# Altium PCB Final.PcbDoc
Units mm, origin at the board's own origin, x right, y up, seen from the top; angles counter-clockwise.
Board outline 60 x 70 mm, 4 copper layers (Top Layer, gnd, pwr, Bottom Layer), stack 0.603 mm thick; 91 components, 65 nets, 402 pads, 105 vias.
Unrouted connection lines stored in the file: 84.
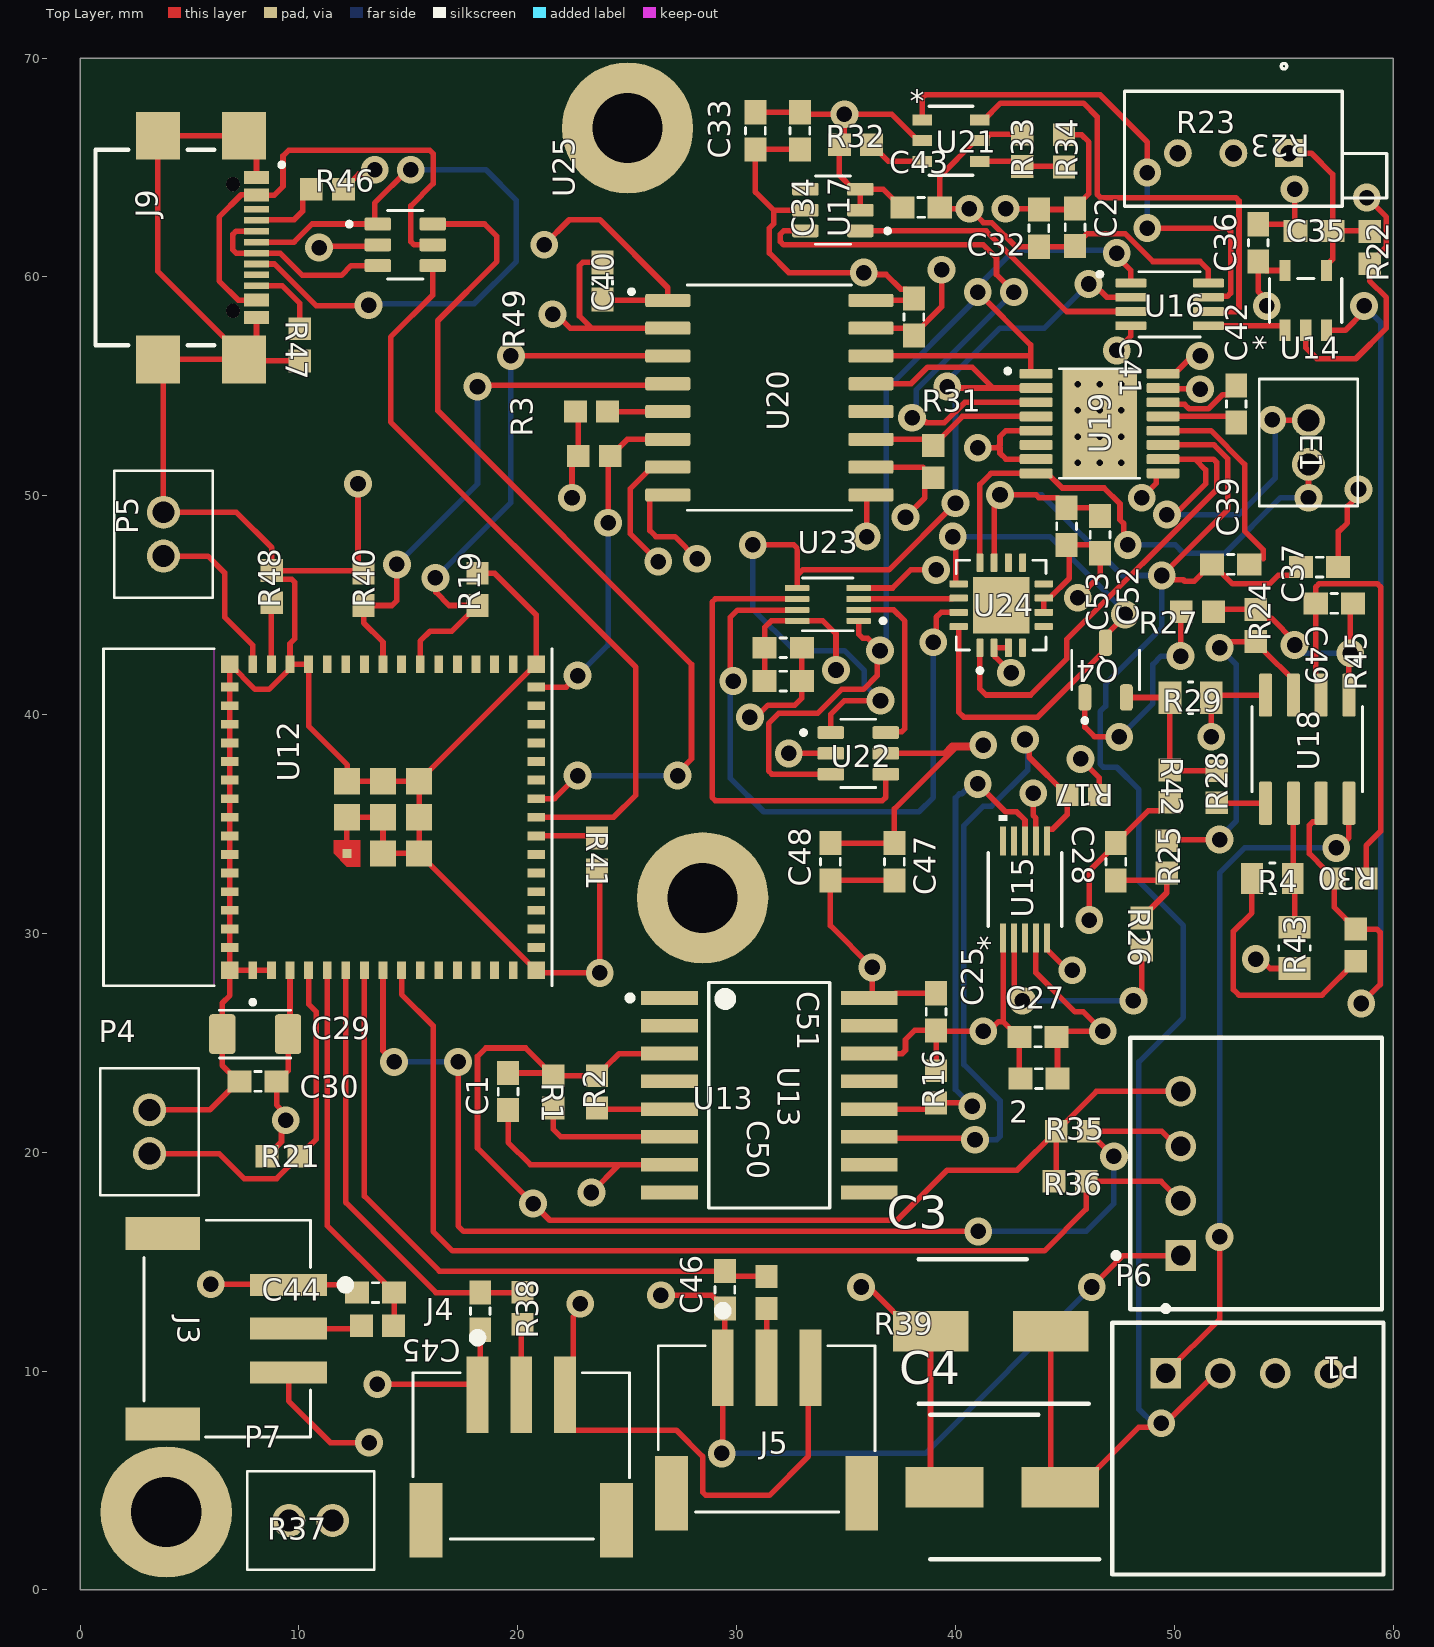
[diagram p0: Top Layer view]
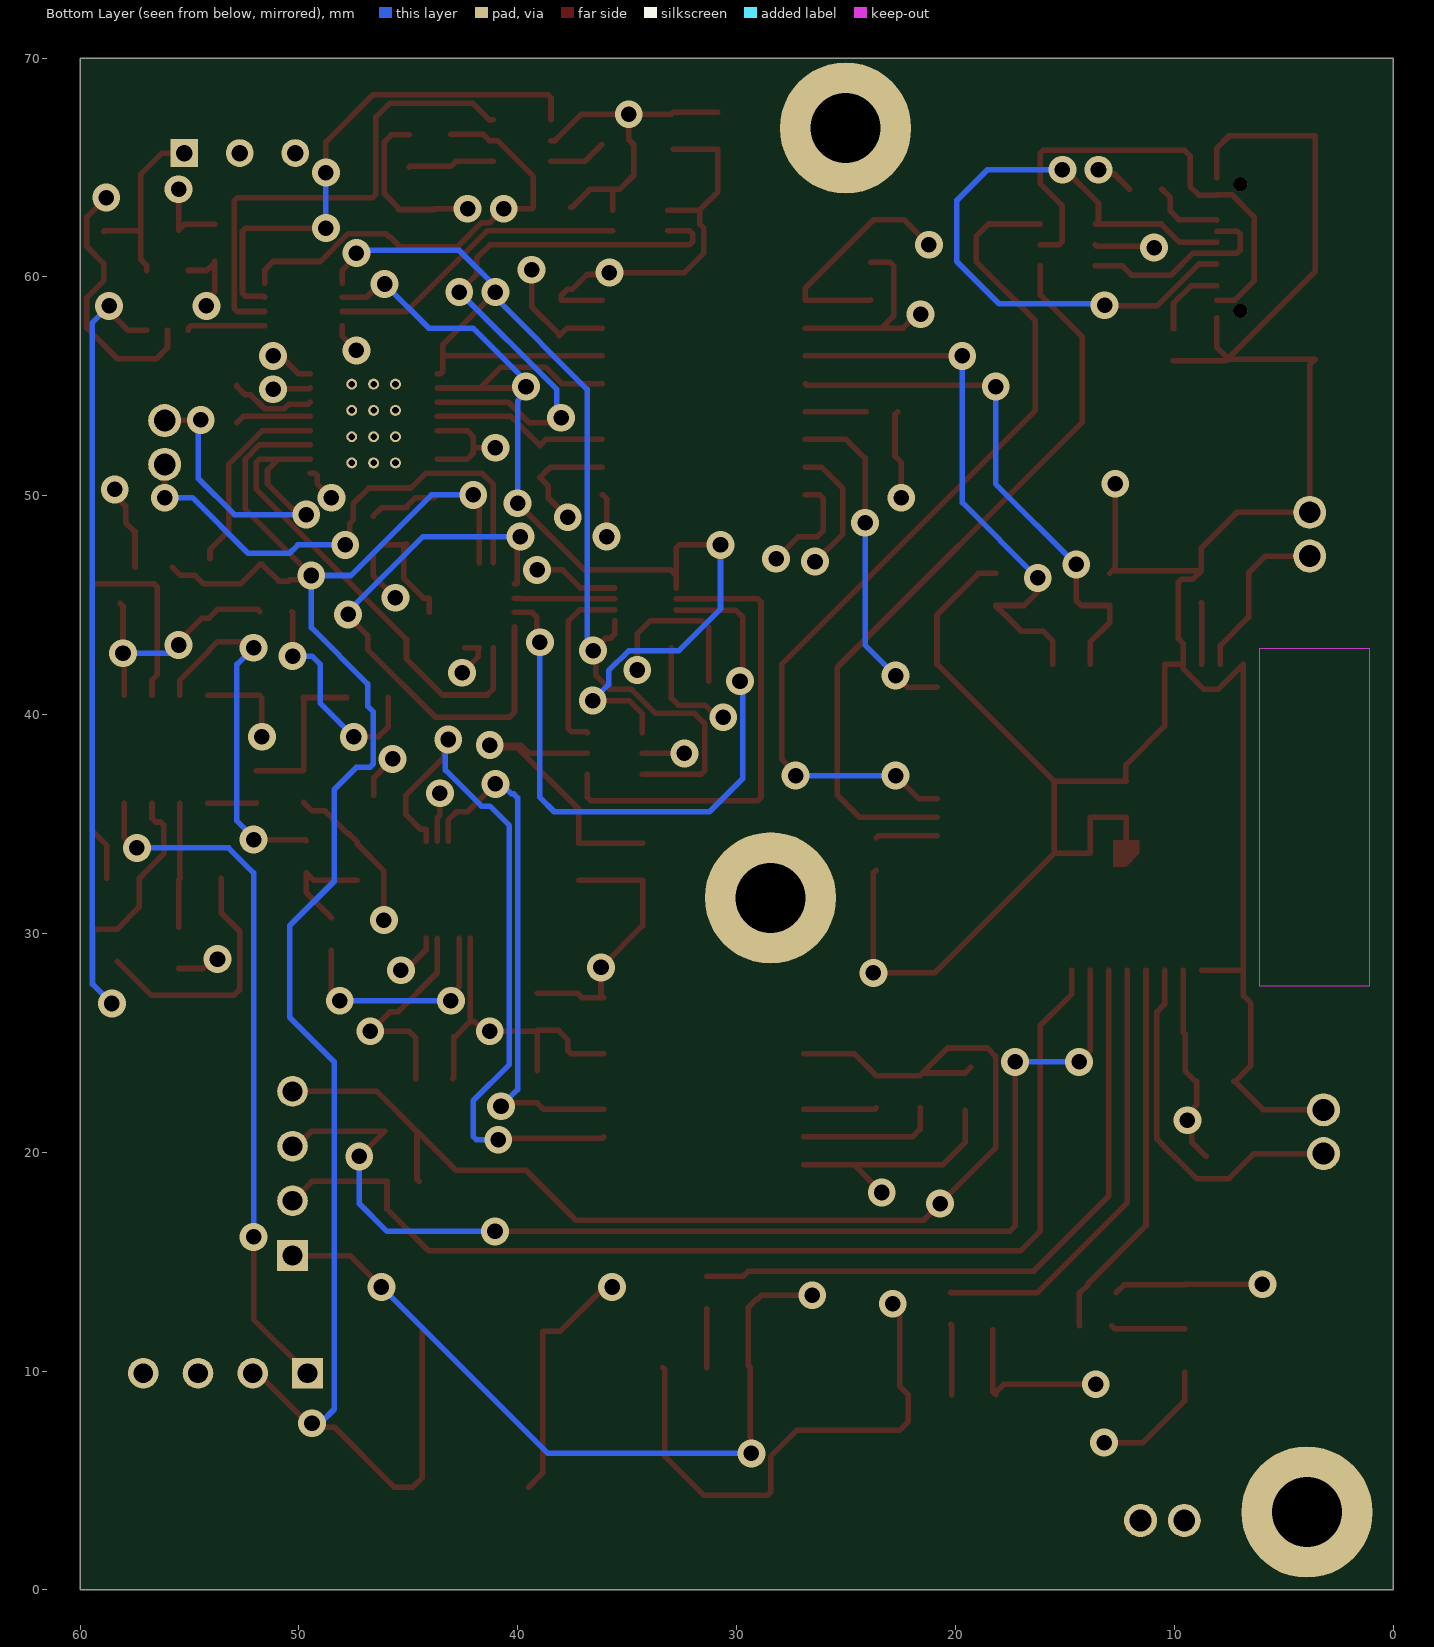
[diagram p1: Bottom Layer view, seen from below]
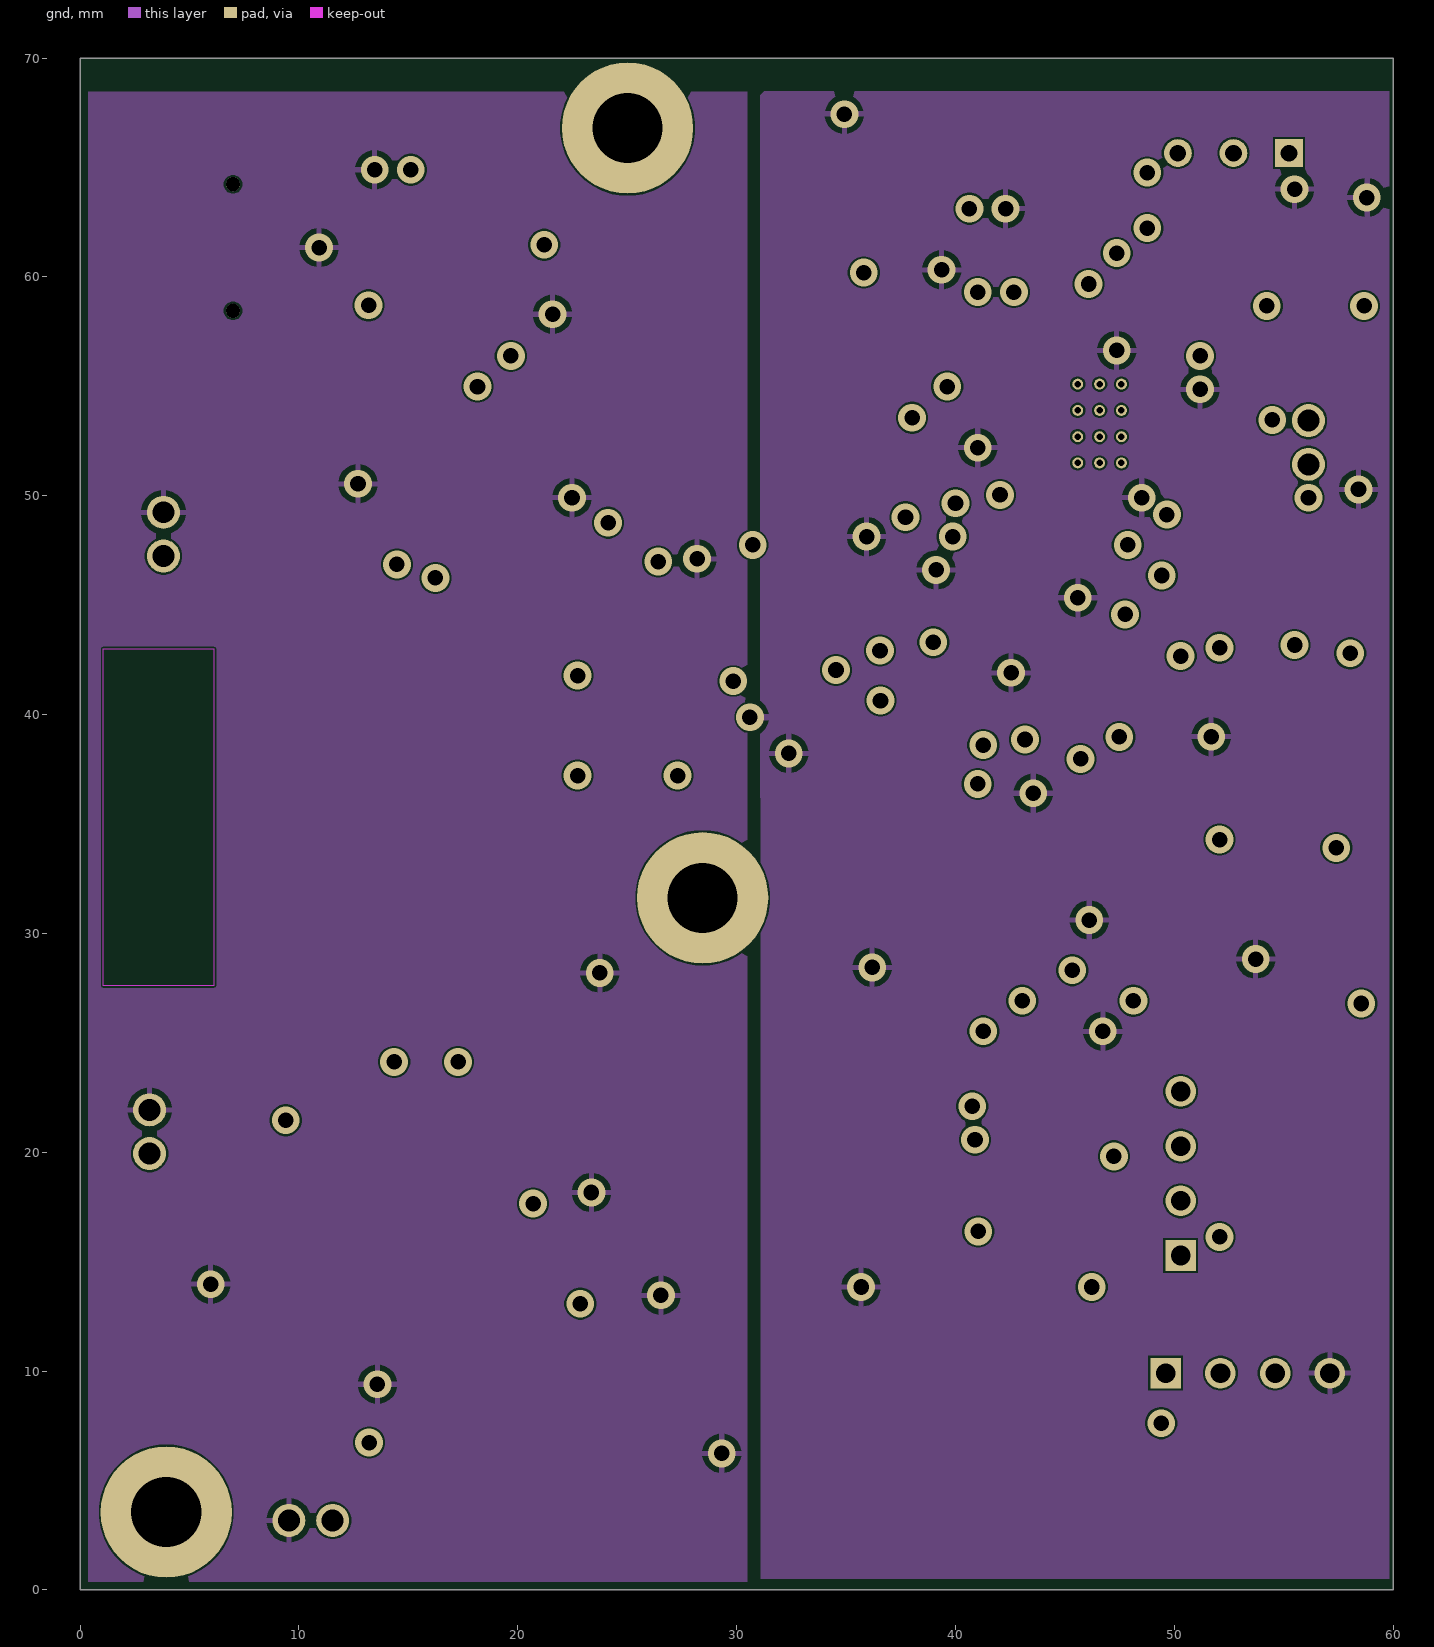
[diagram p2: gnd]
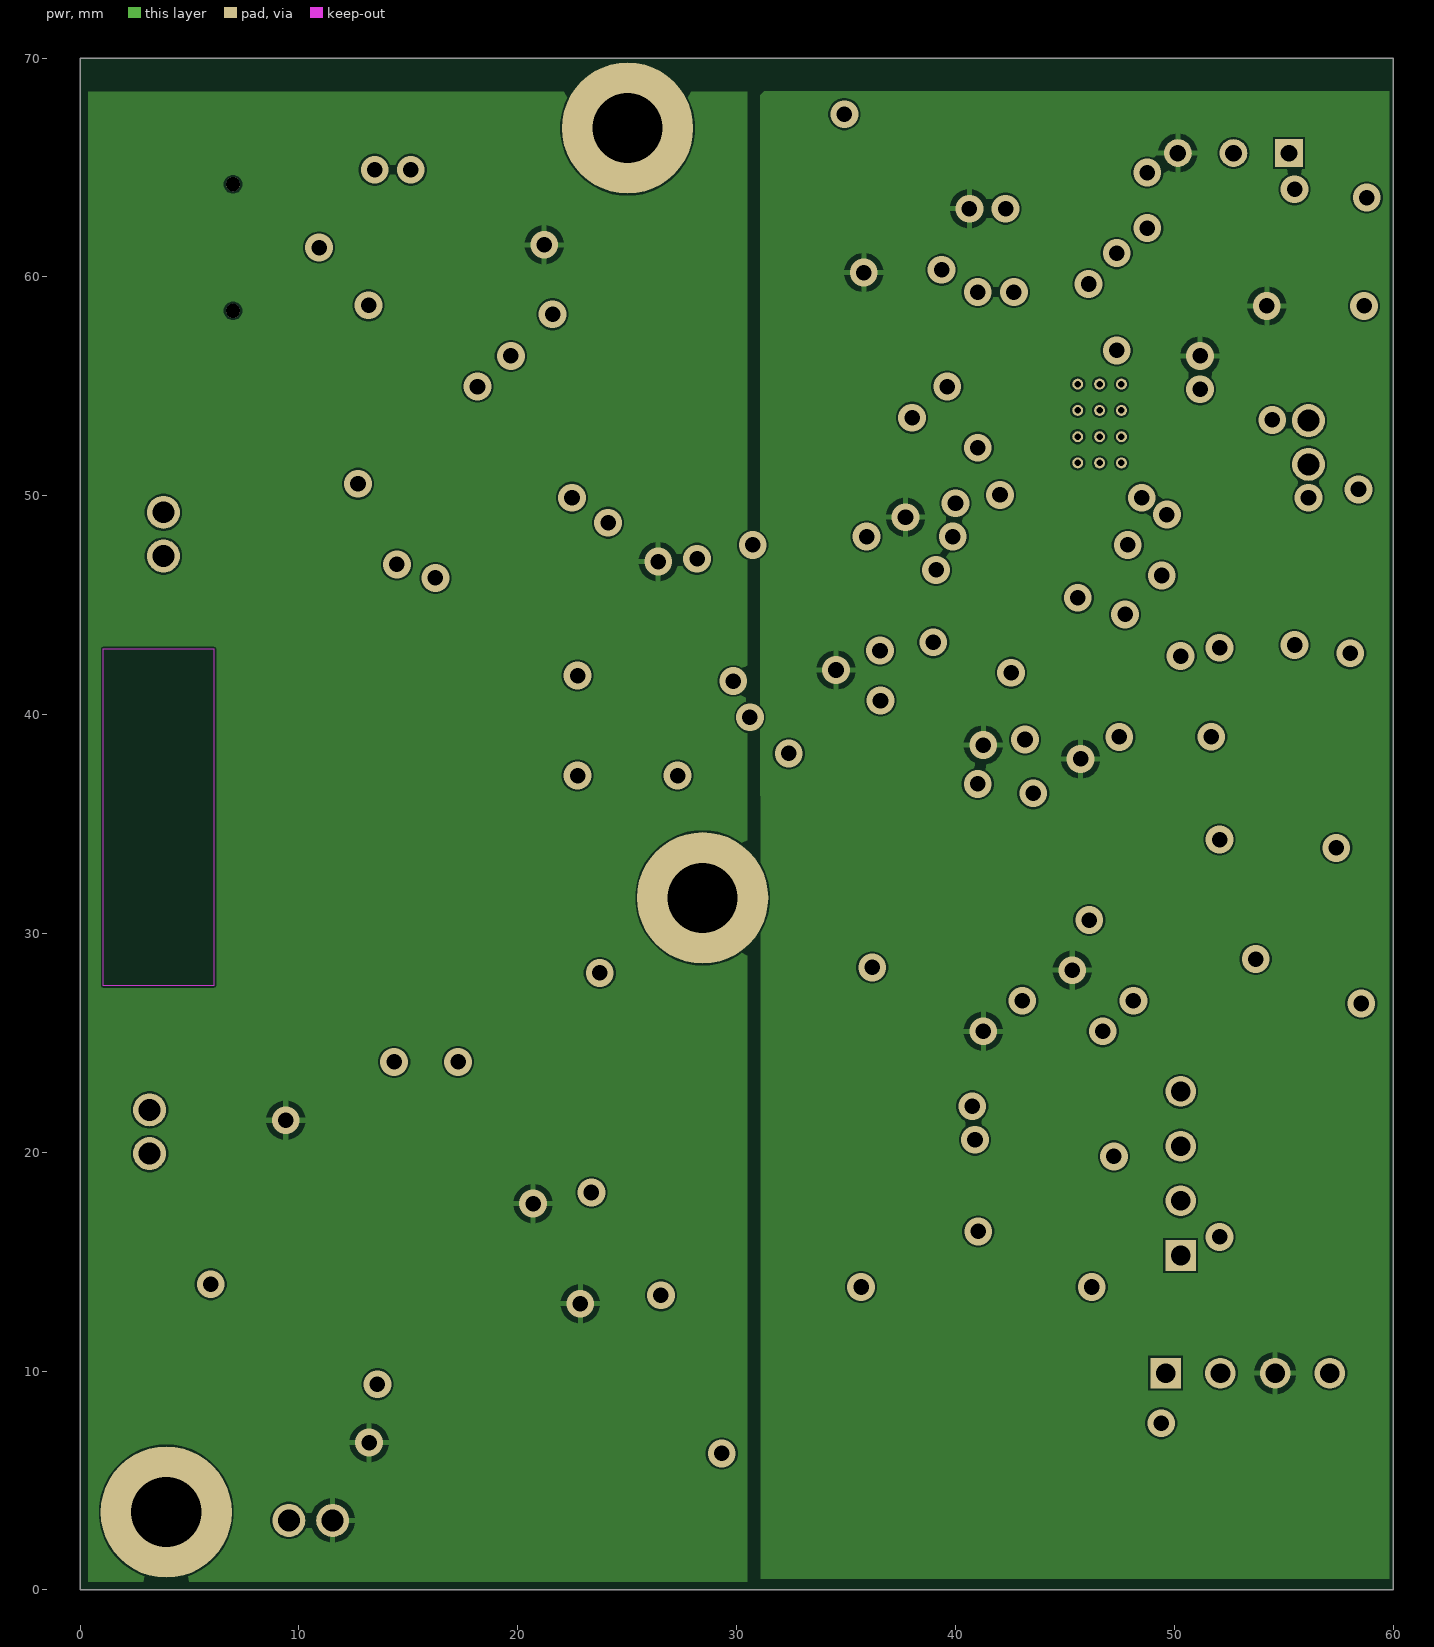
[diagram p3: pwr]
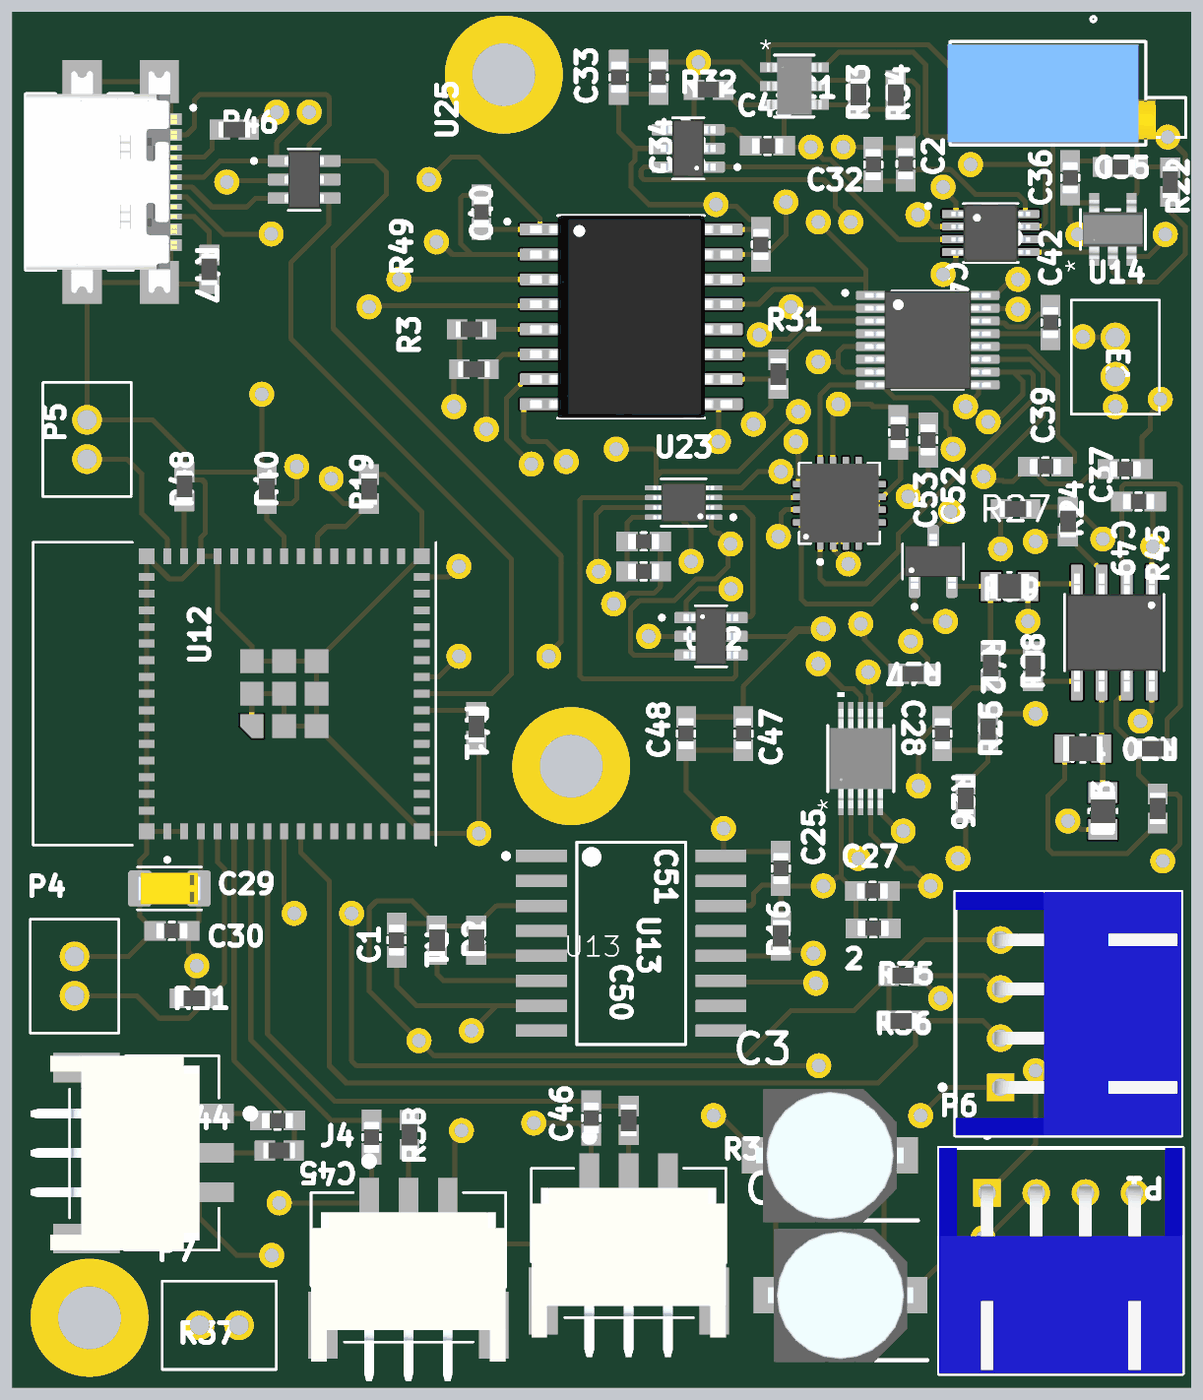
[diagram p4: 3D render of the assembled board from above, using the file's embedded part models]

## Layer stack, top to bottom
Top Solder: solder mask 0.0102, Solder Resist, Dk 3.5
Top Layer: signal copper 0.0356
Dielectric 2: prepreg 0.0711, PP-006, Dk 4.1
gnd: signal copper 0.035
Dielectric 1: dielectric 0.32, FR-4, Dk 4.8
pwr: signal copper 0.035
Dielectric 3: prepreg 0.0711, PP-006, Dk 4.1
Bottom Layer: signal copper 0.0356
Bottom Solder: solder mask 0.0102, Solder Resist, Dk 3.5

## Board outline
0,0 60,0 60,70 0,70

## Design rules (kind name [scope] priority, off if disabled: settings)
Clearance [All] p1: gap=0.09 ignorepadtopadclearanceinfootprint=FALSE
HoleSize [All] p1: absolutevalues=TRUE maxlimit=10 minlimit=0.025 maxpercent=80.000 minpercent=20.000
MinimumSolderMaskSliver [All] p1: minsoldermaskwidth=0.1
PolygonConnect [All] p1: connectstyle=Relief reliefconductorwidth=0.254 reliefentries=4 polygonreliefangle="90 Angle" airgapwidth=0.254
RoutingVias [All] p1: holewidth=0.711 width=1.27 viastyle="Through Hole" minholewidth=0.711 minwidth=1.27 maxholewidth=0.711 maxwidth=1.27
SilkToSilkClearance [All] p1: silktosilkclearance=0.15
SilkToSolderMaskClearance [IsPad] p1: minsilkscreentomaskgap=0.15 clearancetoexposedcopper=TRUE
SolderMaskExpansion [All] p1: expansion=0 istentingtop=FALSE
SupplyNets "Schematic Supply Nets_5" [InNet('ISOLATED_MP1584')] p1: voltage=0.000
SupplyNets "Schematic Supply Nets_4" [InNet('ISO_GND')] p2: voltage=0.000
SupplyNets "Schematic Supply Nets_3" [InNet('ISO_3.3v')] p3: voltage=0.000
SupplyNets "Schematic Supply Nets_2" [InNet('ISO_24v')] p4: voltage=0.000
SupplyNets "Schematic Supply Nets_1" [InNet('GND')] p5: voltage=0.000
SupplyNets "Schematic Supply Nets" [InNet('3.3v')] p6: voltage=0.000
Width [All] p1: maxlimit=0.254 minlimit=0.254 preferedwidth=0.254
26 further rules are at their usual default settings.

## Classes and differential pairs
component class MCU_and_Digital: C1 C25 C29 C30 C44 C45 C46 J3 J4 J5 J9 P1 P4 P5 P6 P7 R1 R2 R16 R17 R19 R21 R35 R36 R37 R38 R39 R40 R41 R46 R47 R48 R49 U12 U13 U25
component class Isolated_Output: 2 C2 C3 C27 C28 C32 C33 C34 C35 C36 C37 C39 C40 C41 C42 C43 R3 R22 R23 R26 R31 R32 R33 R34 U14 U15 U16 U17 U19 U20 U21
component class Current_Sink: C4 C47 C48 C49 C50 C51 C52 C53 E1 Q4 R4 R24 R25 R27 R28 R29 R30 R42 R43 R45 U18 U22 U23 U24

## Components (designator, comment, footprint, x,y, rotation, side; value= is the part's Value field where it differs from the comment)
2 "100n" CAPC1608X90 43.815,23.368 r0 top
C1 "100nf" CAPC1608X90 19.558,22.772 r90 top
C2 "1uf" CAPC1608X90 45.466,62.269 r90 top
C3 "47uf" CAPAE660X800N 41.612,11.811 r180 top
C4 "22uf" CAPAE660X610N 42.147,4.699 r180 top
C25 "100nf" CAPC1608X90 39.116,26.416 r270 top
C27 "1u" CAPC1608X90 43.776,25.273 r0 top
C28 "100nF" CAPC1608X90 47.329,33.274 r90 top
C29 "10uf" RESC3216X125N 8.001,25.4 r180 top
C30 "100nf" CAPC1608X90 8.128,23.241 r0 top
C32 "100nf" CAPC1608X90 43.815,62.23 r90 top
C33 "100nf" CAPC1608X90 30.861,66.675 r90 top
C34 "1uf" CAPC1608X90 32.893,66.675 r90 top
C35 "100nf" CAPC1608X90 56.388,62.103 r0 top
C36 "100nf" CAPC1608X90 53.839,61.558 r270 top
C37 "100nf" CAPC1608X90 56.642,46.736 r180 top
C39 "100nf" CAPC1608X90 52.578,46.863 r180 top
C40 "100nf" CAPC1608X90 23.876,59.817 r270 top
C41 "100nf" CAPC1608X90 38.1,58.166 r270 top
C42 "22nf" CAPC1608X90 52.832,54.19 r90 top
C43 "100nf" CAPC1608X90 38.433,63.18 r180 top
C44 "100nf" CAPC1608X90 13.501,13.589 r0 top
C45 "100nf" CAPC1608X90 18.288,12.739 r90 top
C46 "100nf" CAPC1608X90 29.464,13.716 r90 top
C47 "100nf" CAPC1608X90 37.211,33.274 r270 top
C48 "1uf" CAPC1608X90 34.29,33.274 r270 top
C49 "10nf" CAPC1608X90 57.316,45.085 r0 top
C50 "100nf" CAPC1608X90 32.131,41.529 r0 top
C51 "1uf" CAPC1608X90 32.131,43.053 r0 top
C52 "100nf" CAPC1608X90 46.609,48.221 r270 top
C53 "1uf" CAPC1608X90 45.085,48.602 r270 top
E1 "Electrodes" JST_PHR-2 56.134,52.435 r90 top
J3 "width" JST_S3B-PH-SM4-TB(LF)(SN) 9.525,11.938 r90 top
J4 "frequency" JST_S3B-PH-SM4-TB(LF)(SN) 20.161,8.925 r180 top
J5 "amplitude" JST_S3B-PH-SM4-TB(LF)(SN) 31.369,10.16 r180 top
J9 "USB4110GFA" GCT_USB4110GFA 6.985,61.341 r270 top
P1 "OLED Display" JST-S4B-XH-A(LF)(SN)_V 50.292,19.03 r90 top
P4 "push button" JST_PHR-2 3.175,20.939 r90 top
P5 "enable" JST_PHR-2 3.81,48.244 r90 top
P6 "ISO_power" JST-S4B-XH-A(LF)(SN)_V 53.36,9.906 r0 top
P7 "Normal Power" JST_PHR-2 10.541,3.175 r180 top
Q4 "AO3400A" SOT95P280X125-3N 46.863,42.037 r90 top
R1 "3.3kohm" RESC1607X60N 21.616,22.76 r90 top
R2 "3.3kohm" RESC1607X60N 23.622,22.76 r90 top
R3 "4.7kohm" RESC1607X60N 23.368,53.848 r0 top
R4 "90kohm" RESC2012X65N 54.483,32.512 r180 top
R16 "3.3kohm" RESC1607X60N 39.116,22.987 r90 top
R17 "3.3kohm" RESC1607X60N 45.847,36.322 r0 top
R19 "10kohm" RESC1607X60N 18.161,45.72 r270 top
R21 "10kohm" RESC1607X60N 9.271,19.812 r0 top
R22 "10kohm" RESC1607X60N 58.928,61.341 r90 top
R23 "5kohm" POT_T93XA_VIS 55.245,65.659 r180 top
R24 "10kohm" RESC1607X60N 53.721,44.069 r90 top
R25 "10kohm" RESC1607X60N 49.657,33.501 r90 top
R26 "100ohm" RESC1607X60N 48.514,29.972 r270 top
R27 "100ohm" RESC1607X60N 51.054,44.704 r180 top
R28 "15kohm" RESC1607X60N 51.943,36.703 r270 top
R29 "5ohm" RESC2012X50N 50.749,40.767 r180 top
R30 "15kohm" RESC1607X60N 58.039,32.512 r0 top
R31 "10kohm" RESC1607X60N 38.989,51.562 r270 top
R32 "195kohm" RESC1607X60N 35.433,66.04 r180 top
R33 "976kohm" RESC1607X60N 43.053,65.786 r90 top
R34 "182kohm" RESC1607X60N 44.958,65.759 r90 top
R35 "4.7kohm" RESC1607X60N 45.339,20.955 r0 top
R36 "4.7kohm" RESC1607X60N 45.239,18.669 r0 top
R37 "1kohm" RESC1607X60N 13.589,12.065 r0 top
R38 "1kohm" RESC1607X60N 20.217,12.87 r90 top
R39 "1kohm" RESC1607X60N 31.369,13.589 r90 top
R40 "10kohm" RESC1607X60N 12.954,45.72 r270 top
R41 "10kohm" RESC1607X60N 23.622,33.628 r90 top
R42 "100kohm" RESC1607X60N 49.788,36.73 r90 top
R43 "10kohm" RESC2012X50N 55.499,29.337 r90 top
R45 "100kohm" RESC1607X60N 58.293,29.464 r90 top
R46 "5.1kohm" RESC1607X60N 11.303,64.008 r0 top
R47 "5.1kohm" RESC1607X60N 10.033,56.896 r90 top
R48 "10kohm" RESC1607X60N 8.763,45.847 r270 top
R49 "10kohm" RESC1607X60N 23.495,51.816 r0 top
U12 "ESP32-S3-MINI-1-N8" XCVR_ESP32-S3-MINI-1-N8 13.842,35.307 r90 top
U13 "ISO1640DWR" DW0016A-IPC_A 31.496,22.606 r0 top
U14 "TLV7011DBVR" SOT_1DBVR_TEX 56.007,58.928 r90 top
U15 "DAC80501ZDGSR" DGS10_TEX 43.18,32.004 r90 top
U16 "SN74LVC2G32DCTRG4" SOP65P400X130-8N 49.792,58.745 r0 top
U17 "SN74LVC2G04DBVR" SOT95P280X145-6N#1 34.402,63.053 r180 top
U18 "OPA2192IDR" SOIC127P599X175-8N 56.079,38.42 r270 top
U19 "DRV8876PWPR" IC_DRV8876PWPR 46.588,53.299 r0 top
U20 "ISO7741DWR" SOIC127P1030X265-16N 31.496,54.483 r0 top
U21 "LTC6994CS6-2#TRMPBF" TSOT-23_S6_LIT 39.795,66.228 r0 top
U22 "SN74LVC2G04DBVR" SOT95P280X145-6N#1 35.56,38.227 r0 top
U23 "SN74LVC2G08DCUR" SOP50P310X90-8N 34.168,45.035 r180 top
U24 "ADG5412BCPZ-REEL7" QFN65P400X400X80-17N 42.093,44.998 r90 top
U25 "USBLC6-2SC6" SOT95P280X145-6N#2 14.859,61.468 r0 top

## Footprints (in the part's own frame and the unit in brackets; to place one, negate y for a bottom-side part, rotate by r counter-clockwise, add the part's x,y. Pads: shape width x height; smd on the part's side, far side on the other; paste and mask are expansions set on the pad)
CAPAE660X610N [mm]
  rect 3.55x1.85 smd: 1(-2.65,0) 2(2.65,0)
  silkscreen extent -4.43,-3.3 3.3,3.3, body extent -3.7,-3.4 3.7,3.4, height 6.1
CAPAE660X800N [mm]
  rect 3.45x1.85 smd: 1(-2.75,0) 2(2.75,0)
  silkscreen extent -4.47,-3.3 3.3,3.3, body extent -3.75,-3.4 3.75,3.4, height 8
CAPC1608X90 [mm]
  rect 1.1x1 smd: 1(-0.85,0) 2(0.85,0)
  silkscreen extent -0.15,-0.45 0.15,0.45, body extent -0.8,-0.4 0.8,0.4, height 0.9
DGS10_TEX [mil]
  rect 52.5x11 smd paste+0 mask+0: 1(-87.25,39.37) 2(-87.25,19.68) 3(-87.25,0) 4(-87.25,-19.68) 5(-87.25,-39.37) 6(87.25,-39.37) 7(87.25,-19.68) 8(87.25,0) 9(87.25,19.68) 10(87.25,39.37)
  silkscreen extent -66,-66 134,66, body extent -99,-61 99,61, height 43
DW0016A-IPC_A [mm]
  rect 2.603x0.622 smd paste+0 mask+0: 1(-4.565,4.445) 2(-4.565,3.175) 3(-4.565,1.905) 4(-4.565,0.635) 5(-4.565,-0.635) 6(-4.565,-1.905) 7(-4.565,-3.175) 8(-4.565,-4.445) 9(4.565,-4.445) 10(4.565,-3.175) 11(4.565,-1.905) 12(4.565,-0.635) 13(4.565,0.635) 14(4.565,1.905) 15(4.565,3.175) 16(4.565,4.445)
  silkscreen extent -6.49,-5.15 2.76,5.15
GCT_USB4110GFA [mm]
  rect 0.6x1.15 smd: A1/B12(-3.2,1.075) A4/B9(-2.4,1.075) B1/A12(3.2,1.075) B4/A9(2.4,1.075)
  rect 0.3x1.15 smd: A5(-1.25,1.075) A6(-0.25,1.075) A7(0.25,1.075) A8(1.25,1.075) B5(1.75,1.075) B6(0.75,1.075) B7(-0.75,1.075) B8(-1.75,1.075)
  rect 2.18x2 smd: S1(-5.11,0.5) S2(5.11,0.5) S3(-5.11,-3.43) S4(5.11,-3.43)
  round 0.65 hole 0.65 unplated: ""(-2.89,0) ""(2.89,0)
  silkscreen extent -4.47,-6.28 4.47,2.33, body extent -5.65,-6.28 5.65,1.42, height 3.26
IC_DRV8876PWPR [mm]
  rrect25% 1.5x0.45 smd: 1(-2.9,2.275) 2(-2.9,1.625) 3(-2.9,0.975) 4(-2.9,0.325) 5(-2.9,-0.325) 6(-2.9,-0.975) 7(-2.9,-1.625) 8(-2.9,-2.275) 9(2.9,-2.275) 10(2.9,-1.625) 11(2.9,-0.975) 12(2.9,-0.325) 13(2.9,0.325) 14(2.9,0.975) 15(2.9,1.625) 16(2.9,2.275)
  rect 3.4x5 smd paste-3 mask+0: 17(0,0)
  round 0.5 hole 0.3 mask+0: 18(-1,1.8) 19(0,1.8) 20(1,1.8) 21(-1,0.6) 22(0,0.6) 23(1,0.6) 24(-1,-0.6) 25(0,-0.6) 26(1,-0.6) 27(-1,-1.8) 28(0,-1.8) 29(1,-1.8)
  silkscreen extent -4.3,-2.5 1.83,2.5, body extent -3.2,-2.5 3.2,2.5, height 1.2
JST-S4B-XH-A(LF)(SN)_V [mm] "Header, 4-Leads, Body 12.4x11.5mm, Pitch 2.5mm"
  rect 1.4x1.4 hole 0.9: 1(-3.75,0)
  round 1.4 hole 0.9: 2(-1.25,0) 3(1.25,0) 4(3.75,0)
  silkscreen extent -6.2,-9.2 6.2,3.07, body extent -6.2,-9.2 6.2,2.3, height 6.15
JST_PHR-2 [mm]
  round 1.508 hole 1: 1(-1,0) 2(1,0)
  silkscreen extent -2.9,-2.25 2.9,2.25
JST_S3B-PH-SM4-TB(LF)(SN) [mm]
  rect 1x3.5 smd: 1(2,0) 2(0,0) 3(-2,0)
  rect 1.5x3.4 smd: P1(-4.35,5.75) P2(4.35,5.75)
  silkscreen extent -4.95,-2.8 4.95,6.6, body extent -4.95,0 4.95,8.6, height 5.5
POT_T93XA_VIS [mil]
  rect 50x50 hole 30 paste-99999 mask+0: 1(0,0)
  round 50 hole 30 paste-99999 mask+0: 2(100,0) 3(200,0)
  silkscreen extent -176,-161 296,96, body extent -116,-106 301,91, height 386
QFN65P400X400X80-17N [mm]
  rrect25% 0.84x0.32 smd paste+0 mask+0.102: 1(-1.945,0.975) 2(-1.945,0.325) 3(-1.945,-0.325) 4(-1.945,-0.975) 9(1.945,-0.975) 10(1.945,-0.325) 11(1.945,0.325) 12(1.945,0.975)
  rrect25% 0.32x0.84 smd paste+0 mask+0.102: 5(-0.975,-1.945) 6(-0.325,-1.945) 7(0.325,-1.945) 8(0.975,-1.945) 13(0.975,1.945) 14(0.325,1.945) 15(-0.325,1.945) 16(-0.975,1.945)
  rect 2.6x2.6 smd paste-0.48 mask+0.102: 17(0,0)
  silkscreen extent -3.08,-2.05 2.05,2.05, body extent -2,-2 2,2, height 0.8
RESC1607X60N [mm]
  rect 1.04x1.02 smd: 1(-0.735,0) 2(0.735,0)
  body extent -0.8,-0.4 0.8,0.4, height 0.55
RESC2012X50N [mm]
  rect 1.04x1.47 smd paste+0 mask+0.102: 1(-0.94,0) 2(0.94,0)
  silkscreen extent -0.1,-0.72 0.1,0.72, body extent -1,-0.63 1,0.63, height 0.5
RESC2012X65N [mm]
  rect 1x1.42 smd paste+0 mask+0.102: 1(-0.935,0) 2(0.935,0)
  silkscreen extent -0.12,-0.7 0.12,0.7, body extent -1,-0.63 1,0.63, height 0.65
RESC3216X125N [mm]
  rrect25% 1.2x1.82 smd: 1(-1.505,0) 2(1.505,0)
  silkscreen extent -1.63,-1.09 1.63,1.09, body extent -1.6,-0.8 1.6,0.8, height 1.8
SOIC127P599X175-8N [mm]
  rrect25% 1.97x0.6 smd paste+0 mask+0.102: 1(-2.47,1.905) 2(-2.47,0.635) 3(-2.47,-0.635) 4(-2.47,-1.905) 5(2.47,-1.905) 6(2.47,-0.635) 7(2.47,0.635) 8(2.47,1.905)
  silkscreen extent -4.14,-2.52 1.95,2.52, body extent -3,-2.45 3,2.45, height 1.75
SOIC127P1030X265-16N [mm]
  rrect25% 2.06x0.6 smd paste+0 mask+0.102: 1(-4.64,4.445) 2(-4.64,3.175) 3(-4.64,1.905) 4(-4.64,0.635) 5(-4.64,-0.635) 6(-4.64,-1.905) 7(-4.64,-3.175) 8(-4.64,-4.445) 9(4.64,-4.445) 10(4.64,-3.175) 11(4.64,-1.905) 12(4.64,-0.635) 13(4.64,0.635) 14(4.64,1.905) 15(4.64,3.175) 16(4.64,4.445)
  silkscreen extent -6.4,-5.15 3.75,5.15, body extent -5.15,-5.15 5.15,5.15, height 2.65
SOP50P310X90-8N [mm]
  rrect25% 1.12x0.27 smd: 1(-1.405,0.75) 2(-1.405,0.25) 3(-1.405,-0.25) 4(-1.405,-0.75) 5(1.405,-0.75) 6(1.405,-0.25) 7(1.405,0.25) 8(1.405,0.75)
  silkscreen extent -2.62,-1.2 1.15,1.2, body extent -1.55,-1 1.55,1, height 0.9
SOP65P400X130-8N [mm]
  rrect25% 1.42x0.4 smd paste+0 mask+0.102: 1(-1.77,0.975) 2(-1.77,0.325) 3(-1.77,-0.325) 4(-1.77,-0.975) 5(1.77,-0.975) 6(1.77,-0.325) 7(1.77,0.325) 8(1.77,0.975)
  silkscreen extent -3.29,-1.5 1.4,1.5, body extent -2,-1.47 2,1.47, height 1.3
SOT95P280X125-3N [mm]
  rrect50% 1.21x0.59 smd: 1(-1.255,0.95) 2(-1.255,-0.95) 3(1.255,0)
  silkscreen extent -2.41,-1.55 0.9,1.55, body extent -1.4,-1.45 1.4,1.45, height 1.25
SOT95P280X145-6N#1 [mm]
  rrect25% 1.21x0.58 smd: 1(-1.255,0.95) 2(-1.255,0) 3(-1.255,-0.95) 4(1.255,-0.95) 5(1.255,0) 6(1.255,0.95)
  silkscreen extent -2.6,-1.56 0.8,1.56, body extent -1.4,-1.45 1.4,1.45, height 1.45
SOT95P280X145-6N#2 [mm]
  rrect25% 1.21x0.59 smd: 1(-1.255,0.95) 2(-1.255,0) 3(-1.255,-0.95) 4(1.255,-0.95) 5(1.255,0) 6(1.255,0.95)
  silkscreen extent -2.65,-1.57 0.81,1.57, body extent -1.4,-1.46 1.4,1.46, height 0.4
SOT_1DBVR_TEX [mil]
  rect 38.5x20 smd paste+0 mask+0: 1(-53.75,37.4) 2(-53.75,0) 3(-53.75,-37.4) 4(53.75,-37.4) 5(53.75,37.4)
  silkscreen extent -40,-65 40,65, body extent -59,-60 59,60, height 43
TSOT-23_S6_LIT [mil]
  rect 34.5x20 smd paste+0 mask+0: 1(-51.75,37.4) 2(-51.75,0) 3(-51.75,-37.4) 4(51.75,-37.4) 5(51.75,0) 6(51.75,37.4)
  silkscreen extent -40,-62 40,62, body extent -55,-57 55,57, height 39
XCVR_ESP32-S3-MINI-1-N8 [mm]
  rect 0.8x0.4 smd: 1(-7,5.95) 2(-7,5.1) 3(-7,4.25) 4(-7,3.4) 5(-7,2.55) 6(-7,1.7) 7(-7,0.85) 8(-7,0) 9(-7,-0.85) 10(-7,-1.7) 11(-7,-2.55) 12(-7,-3.4) 13(-7,-4.25) 14(-7,-5.1) 15(-7,-5.95) 31(7,-5.95) 32(7,-5.1) 33(7,-4.25) 34(7,-3.4) 35(7,-2.55) 36(7,-1.7) 37(7,-0.85) 38(7,0) 39(7,0.85) 40(7,1.7) 41(7,2.55) 42(7,3.4) 43(7,4.25) 44(7,5.1) 45(7,5.95)
  rect 0.4x0.8 smd: 16(-5.95,-7) 17(-5.1,-7) 18(-4.25,-7) 19(-3.4,-7) 20(-2.55,-7) 21(-1.7,-7) 22(-0.85,-7) 23(0,-7) 24(0.85,-7) 25(1.7,-7) 26(2.55,-7) 27(3.4,-7) 28(4.25,-7) 29(5.1,-7) 30(5.95,-7) 46(5.95,7) 47(5.1,7) 48(4.25,7) 49(3.4,7) 50(2.55,7) 51(1.7,7) 52(0.85,7) 53(0,7) 54(-0.85,7) 55(-1.7,7) 56(-2.55,7) 57(-3.4,7) 58(-4.25,7) 59(-5.1,7) 60(-5.95,7)
  rect 1.2x1.2 smd: 61(0,0) 61_2(0,1.65) 61_3(1.65,1.65) 61_4(1.65,0) 61_5(1.65,-1.65) 61_6(0,-1.65) 61_7(-1.65,-1.65) 61_8(-1.65,0)
  rect 0.4x0.4 smd paste-1 mask+0: 61_1(-1.65,1.65)
  rect 0.8x0.8 smd: 62(-7,7) 63(-7,-7) 64(7,-7) 65(7,7)
  Top Layer region: -1.05,1.05 -2.25,1.05 -2.25,1.65 -1.65,2.25 -1.05,2.25
  Keep-Out Layer region: 7.7,7.725 -7.7,7.725 -7.7,12.775 7.7,12.775
  Keep-Out Layer region: 7.7,7.725 -7.7,7.725 -7.7,12.775 7.7,12.775
  silkscreen extent -8.55,-7.73 7.7,12.78

## Part data
2 C1 C2 C25 C27 C28 C30 C32 C33 C34 C35 C36 C37 C39 C40 C41 C42 C43 C44 C45 C46 C47 C48 C49 C50 C51 C52 C53: library part C0603KRX7R9BB102, "0603 1 nF 50 V Â±10 % Tolerance X7R Surface Mount Ceramic Capacitor", Package="0603 Yageo", Check_prices=https://www.snapeda.com/parts/C0603KRX7R9BB102/Yageo/view-part/?ref=eda, MF=Yageo, MP=C0603KRX7R9BB102, SnapEDA_Link=https://www.snapeda.com/parts/C0603KRX7R9BB102/Yageo/view-part/?ref=snap
C3: library part GYF1H470MCQ1GS, "Capacitor Polarised", Manufacturer_Name=Nichicon, Datasheet Link=https://www.nichicon.co.jp/english/series_items/catalog_pdf/e-gyf.pdf, Height=8mm, Manufacturer_Part_Number=GYF1H470MCQ1GS
C4: library part HHXC500ARA220MF61G, "Capacitor Polarised", Manufacturer_Name=Chemi-Con, Mouser Part Number=661-HHXC500A220MF61G, Arrow Part Number=HHXC500ARA220MF61G, Arrow Price/Stock=https://www.arrow.com/en/products/hhxc500ara220mf61g/united-chemi-con, Datasheet Link=https://www.chemi-con.co.jp/products/relatedfiles/capacitor/catalog/HXCRA-e.PDF, Height=6.1mm, Manufacturer_Part_Number=HHXC500ARA220MF61G, Mouser Price/Stock=https://www.mouser.com/Search/Refine.aspx?Keyword=661-HHXC500A220MF61G
C29: library part T491A106K016AT, "Capacitors Tantalum PCB 10uF SMD Tol 10% 16 VDC Case Size 3216 T491 Series", Package="SMD-2 KEMET", Check_prices=https://www.snapeda.com/parts/T491A106K016AT/KEMET/view-part/?ref=eda, MF=KEMET, MP=T491A106K016AT, SnapEDA_Link=https://www.snapeda.com/parts/T491A106K016AT/KEMET/view-part/?ref=snap
E1 P4 P5 P7: library part PHR-2, "PH Series 2 Position 2 mm Pitch Free Hanging Housing Connector", Package=None, Availability=Unavailable, MP=PHR-2, Price=None
J3 J4 J5: library part S3B-PH-SM4-TB(LF)(SN), "Connector Header Surface Mount, Right Angle 3 position 0.079 (2.00mm)", Package=None, Check_prices=https://www.snapeda.com/parts/S3B-PH-SM4-TB%20(LF)(SN)/JST/view-part/?ref=eda, MF="JST Sales", MP="S3B-PH-SM4-TB (LF)(SN)", SnapEDA_Link=https://www.snapeda.com/parts/S3B-PH-SM4-TB%20(LF)(SN)/JST/view-part/?ref=snap
J9: "USB-C (USB TYPE-C) USB 2.0 Receptacle Connector 24 (16+8 Dummy) Position Surface Mount, Right Angle", Package=None, Check_prices=https://www.snapeda.com/parts/USB4110GFA/Global+Connector+Technology/view-part/?ref=eda, MF="Global Connector Technology", MP=USB4110GFA, SnapEDA_Link=https://www.snapeda.com/parts/USB4110GFA/Global+Connector+Technology/view-part/?ref=snap
P1 P6: library part CMP-1755-00007-1, "Male Header, Pitch 2.5 mm, 1 x 4 Position, Height 6.1 mm, Tail Length 3.4 mm, -25 to 85 degC, RoHS, Bulk", ComponentLink1Description="Manufacturer URL", ComponentLink1URL=http://www.jst.com/home2.html, ComponentLink2Description=Datasheet, ComponentLink2URL=http://www.jst-mfg.com/product/pdf/eng/eXH.pdf, DatasheetVersion=May-16, PackageDescription="Male Header, Pitch 2.5 mm, 1 x 4 Position, Height 6.1 mm, Tail Length 3.4 mm", PackageReference=S4B-XH-A(LF)(SN)
Q4: "N-Channel 30 V 5.7A (Ta) 1.4W (Ta) Surface Mount SOT-23-3", Package="SOT-23 Alpha &amp; Omega Semiconductor Inc.", Check_prices=https://www.snapeda.com/parts/AO3400A/Alpha/view-part/?ref=eda, MF="Alpha & Omega Semiconductor", MP=AO3400A, SnapEDA_Link=https://www.snapeda.com/parts/AO3400A/Alpha/view-part/?ref=snap
R1 R2 R3 R16 R17 R19 R21 R22 R24 R25 R26 R27 R28 R30 R31 R32 R33 R34 R35 R36 R37 R38 R39 R40 R41 R42 R45 R46 R47 R48 R49: library part RC0603JR-0710KL, "10 kOhms Â±5% 0.1W, 1/10W Chip Resistor 0603 (1608 Metric) Moisture Resistant Thick Film", Package="0603 Yageo", Check_prices=https://www.snapeda.com/parts/RC0603JR-0710KL/Yageo/view-part/?ref=eda, MF=Yageo, MP=RC0603JR-0710KL, SnapEDA_Link=https://www.snapeda.com/parts/RC0603JR-0710KL/Yageo/view-part/?ref=snap
R4: library part RNCF0805BTE5R11, "5.11 Ohms Â±0.1% 0.25W, 1/4W Chip Resistor 0805 (2012 Metric) Automotive AEC-Q200 Thin Film", Package="2012 Stackpole", Check_prices=https://www.snapeda.com/parts/RNCF0805BTE5R11/Stackpole+Electronics/view-part/?ref=eda, MF="Stackpole Electronics Inc", MP=RNCF0805BTE5R11, SnapEDA_Link=https://www.snapeda.com/parts/RNCF0805BTE5R11/Stackpole+Electronics/view-part/?ref=snap
R23: library part T93XA104KT20, "T93 XA 100K 10% TU50 e3", Manufacturer_Name=Vishay, Copyright="Copyright (C) 2026 Ultra Librarian. All rights reserved.", Datasheet=https://www.vishay.com/doc?51026, Manufacturer_Part_Number=T93XA104KT20
R29 R43: library part RG2012V-103-P-T1, "10 kOhms Â±0.02% 0.125W, 1/8W Chip Resistor 0805 (2012 Metric) Anti-Sulfur, Automotive AEC-Q200 Thin Film", Package="2012 TE Connectivity", Check_prices=https://www.snapeda.com/parts/RG2012V-103-P-T1/Susumu/view-part/?ref=eda, MF=Susumu, MP=RG2012V-103-P-T1, SnapEDA_Link=https://www.snapeda.com/parts/RG2012V-103-P-T1/Susumu/view-part/?ref=snap
U12: Package=None, Availability=Unavailable, MF="{'manufacturer': u'Espressif Systems'}", MP=ESP32-S3-MINI-1-N8, Price=None
U13: "Hot-swappable, robust-EMC bidirectional I2C isolator with bidirectional clock 16-SOIC -40 to 125", Manufacturer_Name="Texas Instruments", Copyright="Copyright (C) 2025 Ultra Librarian. All rights reserved.", Manufacturer_Part_Number=ISO1640DWR, RefDes=RefDes, Type=TYPE
U14: "Low power, small size comparator with push-pull output 5-SOT-23 -40 to 125", Manufacturer_Name="Texas Instruments", Copyright="Copyright (C) 2026 Ultra Librarian. All rights reserved.", Manufacturer_Part_Number=TLV7011DBVR, RefDes=RefDes, Type=Type
U15: "True 16-bit, 1-ch, SPI/I2C, voltage-output DAC in WSON package with precision internal reference 10-VSSOP -40 to 125", Manufacturer_Name="Texas Instruments", Copyright="Copyright (C) 2025 Ultra Librarian. All rights reserved.", Manufacturer_Part_Number=DAC80501ZDGSR, RefDes=RefDes, Type=Type
U16: "Dual 2-Input Positive-OR Gate 8-SM8 -40 to 125", Package="SSOP-8 Texas Instruments", Check_prices=https://www.snapeda.com/parts/SN74LVC2G32DCTRG4/Texas+Instruments/view-part/?ref=eda, MF="Texas Instruments", MP=SN74LVC2G32DCTRG4, SnapEDA_Link=https://www.snapeda.com/parts/SN74LVC2G32DCTRG4/Texas+Instruments/view-part/?ref=snap
U17 U22: "2-ch, 1.65-V to 5.5-V inverters", Package="SOT-23-6 Texas Instruments", Check_prices=https://www.snapeda.com/parts/SN74LVC2G04DBVR/Texas+Instruments/view-part/?ref=eda, MF="Texas Instruments", MP=SN74LVC2G04DBVR, SnapEDA_Link=https://www.snapeda.com/parts/SN74LVC2G04DBVR/Texas+Instruments/view-part/?ref=snap
U18: "36-V, Precision, RRIO, Low Offset Voltage, Low Input Bias Current Op Amp With e-trim", Package="SOIC-8 Texas Instruments", Check_prices=https://www.snapeda.com/parts/OPA2192IDR/Texas+Instruments/view-part/?ref=eda, MF="Texas Instruments", MP=OPA2192IDR, SnapEDA_Link=https://www.snapeda.com/parts/OPA2192IDR/Texas+Instruments/view-part/?ref=snap
U19: "40-V, 3.5-A H-bridge motor driver with integrated current sensing & current-sense feedback", Package="HTSSOP-16 Texas Instruments", Check_prices=https://www.snapeda.com/parts/DRV8876PWPR/Texas+Instruments/view-part/?ref=eda, MF="Texas Instruments", MP=DRV8876PWPR, SnapEDA_Link=https://www.snapeda.com/parts/DRV8876PWPR/Texas+Instruments/view-part/?ref=snap
U20: "Robust EMC, quad-channel, 3/1, reinforced digital isolator", Package="SOIC-16 Texas Instruments", Check_prices=https://www.snapeda.com/parts/ISO7741DWR/Texas+Instruments/view-part/?ref=eda, MF="Texas Instruments", MP=ISO7741DWR, SnapEDA_Link=https://www.snapeda.com/parts/ISO7741DWR/Texas+Instruments/view-part/?ref=snap
U21: library part LTC6994CS6-2TRMPBF, "Description", Manufacturer_Name="Analog Devices Inc", Copyright="Copyright (C) 2025 Ultra Librarian. All rights reserved.", Manufacturer_Part_Number=LTC6994CS6-2#TRMPBF, RefDes=RefDes, Type=Type
U23: "2-ch, 2-input, 1.65-V to 5.5-V AND gates", Package="VSSOP-8 Texas Instruments", Availability="In Stock", Check_prices=https://www.snapeda.com/parts/SN74LVC2G08DCUR/Texas+Instruments/view-part/?ref=eda, MF="Texas Instruments", MP=SN74LVC2G08DCUR, Price=None, Purchase-URL=https://pricing.snapeda.com/search/part/SN74LVC2G08DCUR/?ref=eda, SnapEDA_Link=https://www.snapeda.com/parts/SN74LVC2G08DCUR/Texas+Instruments/view-part/?ref=snap
U24: "High Voltage Latch-Up Proof, Quad SPST Switches", Package="LFCSP -16 Analog Devices", Check_prices=https://www.snapeda.com/parts/ADG5412BCPZ-REEL7/Analog+Devices/view-part/?ref=eda, MF="Analog Devices", MP=ADG5412BCPZ-REEL7, SnapEDA_Link=https://www.snapeda.com/parts/ADG5412BCPZ-REEL7/Analog+Devices/view-part/?ref=snap
U25: "17V Clamp 5A (8/20Âµs) Ipp Tvs Diode Surface Mount SOT-23-6", Package="SOT-23-6 STMicroelectronics", Availability="In Stock", Check_prices=https://www.snapeda.com/parts/USBLC6-2SC6/STMicroelectronics/view-part/?ref=eda, MF=STMicroelectronics, MP=USBLC6-2SC6, Price=None, Purchase-URL=https://pricing.snapeda.com/search/part/USBLC6-2SC6/?ref=eda, SnapEDA_Link=https://www.snapeda.com/parts/USBLC6-2SC6/STMicroelectronics/view-part/?ref=snap

## Free pads (board coordinates)
  round 6 hole 3.2 unplated: mh1(3.937,3.556) mh2(25.019,66.802) mh3(28.448,31.623)

## Via types
v1: diameter 1.27, hole 0.711, Top Layer to Bottom Layer, 105 vias

## Nets (pads, with @x,y where several pads share a name; then routed paths per layer and width w, separated by ;. In a path a pad name is that pad's centre, name@x,y a point inside that pad or via, vN(x,y) a via of type N, cw(c..) or ccw(c..) an arc to the next point about the centre after c; other vN are vias at no path point)
1B: U22.6 U23.2 | length 8.2
  Top Layer w0.254: U23.2 37.18,44.785 37.688,44.277 37.688,39.361 37.539,39.212 36.85,39.212 U22.6
1Y: U23.7 U24.15 | length 30.2
  Top Layer w0.254: v1(29.845,41.529) 29.718,41.656 29.718,44.45 30.045,44.777 32.755,44.777 U23.7 ; v1(38.989,43.307) 39.124,43.442 39.124,44.45 39.347,44.673 U24.15
  Bottom Layer w0.254: v1(29.845,41.529) 29.718,41.402 29.718,37.084 31.242,35.56 38.332,35.56 38.989,36.217 v1(38.989,43.307)
2B: U22.4 U23.6 | length 22
  Top Layer w0.254: U23.6 29.032,45.285 28.883,45.136 28.883,36.217 29.032,36.068 36.666,36.068 36.815,36.217 U22.4
2Y: U23.3 U24.14 | length 4.6
  Top Layer w0.254: U23.3 39.85,45.285 39.888,45.323 U24.14
3.3v: C1.2 C29.1 C30.2 C40.2 J3.3 J4.3 J5.3 P1.4 P7.1 R1.2 R2.2 R21.1 R35.1 R36.1 U12.3 U13.3 U20.1 U20.7 | length 110.6
  Top Layer w0.254: R21.1 8.546,19.812 8.929,20.195 8.929,20.205 9.204,20.48 9.204,21.269 v1(9.398,21.463) 9.398,21.738 8.978,22.158 C30.2 ; C30.2@9.028,23.241 9.506,23.719 C29.1 9.592,25.486 U12.3 ; J3.3 9.525,8.636 11.43,6.731 v1(13.208,6.731) ; C1.2@19.304,23.876 C1.2 R1.2@21.489,23.622 ; v1(21.209,61.468) 22.352,62.611 23.749,62.611 26.856,59.504 U20.1 23.915,58.928 C40.2 ; v1(22.86,13.081) 22.86,12.806 22.534,12.48 22.534,9.298 J4.3 22.161,7.675 22.534,7.302 27.242,7.302 28.448,6.096 28.448,4.467 28.597,4.318 31.496,4.318 33.274,6.096 33.274,10.065 J5.3 ; v1(26.416,46.99) 25.146,48.26 25.146,50.328 26.126,51.308 U20.7 ; U13.3 24.638,24.511 24.015,23.888 24.005,23.888 23.622,23.505 R2.2 R1.2 21.616,23.505 20.356,24.765 18.542,24.765 18.161,24.384 18.161,20.193 v1(20.701,17.653) 21.463,16.891 37.338,16.891 39.624,19.177 42.816,19.177 44.594,20.955 R35.1 ; R36.1 44.604,18.769 R35.1 ; P1.4 46.439,22.78 44.614,20.955 R35.1
COMP_OUT: U14.1 U16.5 | length 3.6
  Top Layer w0.254: U16.5 54.93,57.77 55.057,57.643 U14.1
GND: C1.1 C29.2 C30.1 C40.1 C44.1 C45.1 C46.1 J3.1 J4.1 J5.1 J9.A1/B12 J9.B1/A12 J9.S1 J9.S2 J9.S3 J9.S4 P1.1 P4.2 P5.2 P7.2 R3.1 R19.1 R40.1 R41.1 R46.2 R47.1 R48.1 R49.1 U12.1 U12.2 U12.42 U12.43 U12.46 U12.47 U12.48 U12.49 U12.50 U12.51 U12.52 U12.53 U12.54 U12.55 U12.56 U12.57 U12.58 U12.59 U12.60 U12.61 U12.61_1 U12.61_2 U12.61_3 U12.61_4 U12.61_5 U12.61_6 U12.61_7 U12.61_8 U12.62 U12.63 U12.64 U12.65 U13.7 U20.2 U20.8 U25.2 | length 216
  Top Layer w0.254: P4.2 5.926,21.939 C30.1@7.228,23.241 ; v1(5.969,13.97) 9.493,13.97 J3.1 12.302,13.938 C44.1 ; C30.1 C30.1@7.228,23.241 ; J9.B1/A12 8.06,56.806 J9.S2 J9.S4 3.81,55.976 P5.2 7.144,49.244 8.763,47.625 R48.1 ; J9.A1/B12 8.06,65.876 J9.S1 J9.S3 3.555,60.251 7.645,56.161 R47.1 ; U12.2 U12.1 U12.62 ; v1(10.922,61.341) 10.986,61.404 13.541,61.404 U25.2 ; R46.2 12.048,64.008 12.743,64.703 13.268,64.703 v1(13.462,64.897) ; U12.61_1 U12.61_2 U12.61 U12.61_8 U12.61_7 ; v1(12.7,50.546) 12.7,46.709 R40.1@12.827,46.582 ; R40.1 R40.1@12.827,46.582 ; v1(13.589,9.398) 17.788,9.398 18.161,9.025 J4.1 18.288,9.052 C45.1 ; R19.1 18.95,46.455 20.842,44.563 U12.64 U12.61_5 ; C1.1 19.558,20.447 20.574,19.431 24.638,19.431 ; v1(21.59,58.293) 21.757,58.293 22.392,57.658 23.368,57.658 ; v1(22.479,49.911) 22.479,51.535 R49.1 22.76,53.721 R3.1 ; v1(23.368,18.161) 24.638,19.431 ; R41.1 23.749,32.766 v1(23.749,28.194) 20.955,28.194 U12.63 U12.61_7 ; C40.1 22.97,60.667 22.821,60.518 22.821,58.205 23.368,57.658 ; v1(26.543,13.462) 28.868,13.462 29.041,13.289 29.091,13.289 29.464,12.916 C46.1 29.464,10.255 J5.1 29.369,6.255 29.337,6.223 v1(29.321,6.239) ; U20.8 26.208,50.038 26.035,49.865 26.035,48.409 26.311,48.133 27.178,48.133 v1(28.194,47.117) ; U20.2 23.368,57.658 ; U13.7 24.638,19.431 ; v1(46.228,13.843) 47.665,15.28 P1.1 ; U12.62 U12.60 U12.59 U12.58 U12.57 U12.56 U12.55 U12.54 U12.53 U12.52 U12.51 U12.50 U12.49 U12.48 U12.47 U12.46 U12.65 8.001,41.148 8.633,41.148 9.592,42.107 U12.43 ; U12.62 6.842,27.162 6.496,26.816 C29.2 6.496,23.973 C30.1@7.228,23.241 ; R48.1 R40.1@12.827,46.582 ; R48.1 8.763,46.572 9.146,46.189 9.669,46.189 9.818,46.04 9.818,43.473 9.592,43.247 U12.43 ; U12.43 U12.42 10.442,39.469 12.214,37.697 12.214,36.979 U12.61_3 U12.61_4 U12.61_5 ; U12.61_7 U12.61_6 U12.61_5
  Bottom Layer w0.254: v1(29.321,6.239) 38.624,6.239 v1(46.228,13.843)
IND: R31.1 U19.4 U20.11 | length 8.2
  Top Layer w0.254: U20.11 38.708,52.578 R31.1 38.989,52.307 39.372,52.69 39.382,52.69 40.316,53.624 U19.4
ISO_3.3v: 2.1 C2.1 C25.2 C27.1 C32.1 C33.1 C34.1 C36.2 C41.1 C43.1 C47.1 C48.1 C50.1 C51.1 P6.3 R16.2 R17.2 R23.3 R31.2 R33.2 U13.14 U14.5 U15.1 U15.5 U16.8 U17.5 U19.16 U20.10 U20.16 U21.5 U22.5 U23.8 | length 91.5
  Top Layer w0.254: C50.1 C51.1 31.281,43.981 31.585,44.285 U23.8 33.947,44.285 34.544,43.688 v1(34.544,42.037) ; C34.1 C33.1 30.861,63.881 31.689,63.053 ; U17.5 31.689,63.053 ; C48.1 C47.1 37.211,35.687 40.005,38.481 41.148,38.481 v1(41.275,38.608) 39.857,38.608 39.476,38.227 U22.5 ; U13.14 37.57,24.511 37.719,24.66 37.719,25.146 38.139,25.566 C25.2 ; U20.10 38.508,51.308 38.596,51.22 38.606,51.22 R31.2@38.989,50.837 ; U20.16 38.012,58.928 38.012,59.154 37.727,59.439 37.501,59.439 36.83,60.11 35.902,60.11 v1(35.814,60.198) 32.385,60.198 31.496,61.087 31.496,62.23 31.689,62.423 31.689,63.053 ; v1(37.719,49.022) 38.606,49.909 38.606,50.444 R31.2 ; R16.2 C25.2 ; U15.1 42.18,25.969 ; 2.1 42.926,23.407 C27.1 42.876,25.273 42.18,25.969 ; R33.2 41.587,66.521 41.294,66.228 U21.5 40.926,66.228 39.283,64.586 C43.1 39.345,63.119 v1(40.64,63.119) 41.275,62.484 41.656,62.484 42.76,61.38 C32.1 45.427,61.38 C2.1 45.466,61.469 45.839,61.842 45.889,61.842 46.023,61.976 47.752,61.976 49.022,60.706 51.181,60.706 51.562,60.325 U16.8 ; U15.5 44.18,29.261 45.12,28.321 v1(45.339,28.321) ; v1(45.72,37.973) 46.582,37.111 R17.2 ; U19.16 50.013,55.574 50.633,56.194 50.987,56.194 v1(51.181,56.388) ; C36.2@53.839,60.666 54.212,60.293 U14.5 ; C36.2 53.839,59.338 54.229,58.949 v1(54.229,58.674) ; C25.2 39.155,25.527 v1(41.275,25.527) 41.528,25.527 41.97,25.969 42.18,25.969
ISO_24v: C3.1 C4.1 C37.2 C39.2 C52.1 C53.1 P6.2 U19.11 U24.11 | length 94.4
  Top Layer w0.254: U24.11 41.768,49.494 42.037,49.763 v1(42.037,50.038) 43.688,50.038 43.815,49.911 44.676,49.911 45.085,49.502 C53.1 46.236,49.452 46.609,49.079 C52.1 ; C3.1 44.362,5.134 C4.1 45.647,4.699 48.387,7.439 49.222,7.439 v1(49.403,7.62) 49.614,7.62 51.9,9.906 P6.2 ; U19.11 51.816,52.324 52.451,51.689 52.451,49.373 v1(49.433,46.355) 49.627,46.161 50.41,46.161 50.47,46.101 50.916,46.101 51.678,46.863 C39.2 ; C39.2@51.778,46.863 52.667,45.974 54.356,45.974 54.745,46.363 55.419,46.363 C37.2
  Bottom Layer w0.254: v1(42.037,50.038) 43.942,50.038 47.625,46.355 v1(49.433,46.355) 49.433,43.972 46.863,41.402 46.863,40.386 46.609,40.132 46.609,37.741 46.758,37.592 47.371,37.592 48.387,36.576 48.387,32.385 50.419,30.353 50.419,26.162 48.387,24.13 48.387,8.255 49.022,7.62 v1(49.403,7.62)
ISO_GND: 2.2 C2.2 C3.2 C4.2 C25.1 C27.2 C28.2 C32.2 C33.2 C34.2 C35.1 C36.1 C37.1 C41.2 C43.2 C47.2 C48.2 C50.2 C51.2 C52.2 C53.2 P6.4 R22.1 R29.1 R32.2 R34.2 R42.1 R43.1 U13.16 U14.2 U15.4 U15.7 U16.4 U17.2 U17.3 U18.4 U19.5 U19.7 U19.9 U19.15 U20.9 U20.15 U21.2 U22.2 U23.4 U24.2 U24.3 U24.6 U24.7 | length 130.9
  Top Layer w0.254: v1(30.607,39.878) 30.882,39.878 31.436,40.432 32.663,40.432 32.981,40.75 C50.2 C51.2 ; C33.2 C34.2 32.981,67.437 v1(34.925,67.437) ; v1(32.385,38.227) U22.2 ; U23.4 37.128,45.785 37.952,46.609 v1(39.116,46.609) ; U17.2 U17.3 ; v1(35.687,13.843) 35.881,13.649 36.224,13.649 38.062,11.811 C3.2 38.862,5.334 C4.2 ; v1(35.941,48.133) 35.941,49.865 36.114,50.038 U20.9 ; U20.15 37.758,57.658 C41.2 38.1,57.366 39.37,58.636 v1(39.37,60.325) ; C47.2 C48.2 34.29,30.353 v1(36.195,28.448) 36.195,27.185 U13.16 37.052,27.051 37.267,27.266 C25.1 ; C43.2 37.533,63.18 36.711,64.003 U17.3 ; U21.2 38.297,66.228 37.088,67.437 v1(34.925,67.437) ; v1(41.021,52.197) 41.91,52.197 42.037,52.324 42.037,52.705 42.306,52.974 U19.5 ; 42.037,52.197 42.037,51.943 42.306,51.674 U19.7 ; v1(42.291,63.119) 43.776,63.119 C32.2 45.427,63.08 C2.2 45.466,63.169 46.101,63.804 46.101,66.167 45.774,66.494 R34.2 ; U24.3 U24.2 41.801,43.02 41.801,42.654 v1(42.545,41.91) ; v1(43.557,36.404) 43.557,35.388 43.678,35.268 43.678,34.223 U15.7 ; U15.4 43.68,28.202 45.466,26.416 45.847,26.416 v1(46.736,25.527) 44.958,25.527 44.665,25.234 2.2 ; U24.6 U24.7 44.298,45.323 45.203,46.228 45.203,47.634 C53.2 ; C53.2@45.085,47.802 C53.2 ; v1(45.593,45.339) 46.609,46.355 C52.2 46.609,47.379 46.236,47.752 C53.2 ; v1(46.116,30.61) 46.116,32.861 47.329,34.074 C28.2 ; C28.2@47.329,34.174 47.702,34.547 47.752,34.547 48.807,35.602 49.405,35.602 R42.1@49.788,35.985 ; v1(47.371,56.642) 48.022,57.293 U16.4 ; v1(48.514,49.911) 49.17,50.567 49.17,50.926 49.268,51.024 U19.9 ; U19.15 49.518,54.894 51.151,54.894 v1(51.181,54.864) ; v1(51.689,38.989) R29.1 51.812,40.89 U18.4 ; v1(53.721,28.829) 53.951,28.829 54.383,28.397 R43.1 ; C36.1 55.233,62.408 55.499,62.142 v1(55.499,64.008) ; U14.2 56.007,56.769 56.515,56.261 58.293,56.261 59.69,57.658 59.69,59.055 58.928,59.817 R22.1 58.928,60.616 59.69,61.378 59.69,62.738 v1(58.801,63.627) ; C37.1 57.492,48.387 57.542,48.387 57.915,48.76 57.915,49.512 58.42,50.017 v1(58.42,50.292) ; v1(34.925,67.437) 34.925,66.267 R32.2 34.698,64.647 35.342,64.003 U17.3
ISOLATED_MP1584: P6.1 U18.8 | length 32
  Top Layer w0.254: P6.1 52.07,12.366 v1(52.07,16.129) ; v1(57.404,33.909) 57.531,33.909 57.984,34.362 U18.8
  Bottom Layer w0.254: v1(52.07,16.129) 52.07,32.766 53.213,33.909 v1(57.404,33.909)
IY: U17.6 U19.3 | length 27.4
  Top Layer w0.254: U17.6 32.153,62.103 32.004,61.954 32.004,61.617 32.153,61.468 41.275,61.468 41.876,60.867 41.876,60.105 v1(42.672,59.309) ; v1(38.02,53.565) 38.215,53.37 38.647,53.37 38.677,53.34 39.497,53.34 40.431,54.274 U19.3
  Bottom Layer w0.254: v1(38.02,53.565) 38.215,53.759 38.215,54.852 v1(42.672,59.309)
MCU_D+: U12.24 U25.6 | length 40.9
  Top Layer w0.254: U25.6 18.481,62.418 19.05,61.849 19.05,60.706 16.343,57.999 16.343,53.888 27.94,42.291 27.94,37.973 27.305,37.338 v1(27.305,37.211) ; U12.24 21.679,36.157 v1(22.733,37.211)
  Bottom Layer w0.254: v1(22.733,37.211) v1(27.305,37.211)
MCU_D-: U12.23 U25.4 | length 34.6
  Top Layer w0.254: U25.4 16.114,59.167 14.194,57.247 14.194,53.37 25.4,42.164 25.4,36.322 24.385,35.307 U12.23
NetC28_1: C28.1 R25.1 R26.1 | length 5
  Top Layer w0.254: C28.1 49.315,32.424 R25.1 49.657,31.86 48.514,30.717 R26.1
NetC35_2: C35.2 R22.2 R23.1 U14.4 | length 8.6
  Top Layer w0.254: R23.1 56.261,65.659 57.238,64.682 C35.2 ; U14.4 56.957,60.528 57.238,60.809 C35.2 ; R22.2 58.901,62.103 C35.2
NetC39_1: C39.1 U19.12 | length 9
  Top Layer w0.254: U19.12 51.674,52.974 53.213,51.435 53.213,48.387 54.063,47.537 54.063,47.117
NetC42_1: C42.1 U19.13 | length 3.5
  Top Layer w0.254: U19.13 52.548,53.624 C42.1
NetC42_2: C42.2 U19.14 | length 3.9
  Top Layer w0.254: U19.14 49.586,54.176 50.472,54.176 50.673,53.975 51.562,53.975 52.204,54.617 52.459,54.617 52.832,54.99 C42.2
NetC44_2: C44.2 R37.2 U12.5 | length 17.5
  Top Layer w0.254: U12.5 11.292,16.648 13.928,14.012 13.928,13.962 14.301,13.589 C44.2 14.351,12.092 R37.2
NetC45_2: C45.2 R38.2 U12.6 | length 20.4
  Top Layer w0.254: U12.6 12.142,17.703 16.256,13.589 C45.2 20.201,13.589 R38.2
NetC46_2: C46.2 R39.2 U12.7 | length 30.2
  Top Layer w0.254: U12.7 12.992,17.996 16.422,14.566 C46.2 29.706,14.324 R39.2
NetC49_1: C49.1 R30.2 U18.2 | length 21.7
  Top Layer w0.254: U18.2 56.714,41.575 56.466,41.823 56.466,45.825 56.615,45.974 59.287,45.974 59.436,45.825 59.436,34.671 58.774,34.009 R30.2
NetC49_2: C49.2 R24.2 R27.1 U18.1 | length 11.5
  Top Layer w0.254: R27.1 51.889,44.804 R24.2 ; R24.2@53.721,44.794 54.104,44.411 54.435,44.411 55.499,43.347 v1(55.499,43.18) ; U18.1 57.984,42.744 v1(58.039,42.799) 58.039,44.958 C49.2
  Bottom Layer w0.254: v1(55.499,43.18) 55.88,42.799 v1(58.039,42.799)
NetE1_1: E1.1 U19.8 U24.12 | length 23.8
  Top Layer w0.254: U24.12 41.118,50.516 41.626,51.024 U19.8 44.213,51.024 44.882,50.355 46.799,50.355 47.522,49.633 47.522,48.895 47.685,48.732 47.685,47.946 v1(47.879,47.752) ; v1(56.134,49.911) E1.1
  Bottom Layer w0.254: v1(47.879,47.752) 50.048,47.752 50.429,47.371 52.324,47.371 54.864,49.911 v1(56.134,49.911)
NetE1_2: E1.2 U19.10 U24.1 | length 34.7
  Top Layer w0.254: U24.1 41.118,41.178 41.402,40.894 43.434,40.894 45.085,42.545 45.085,43.434 51.943,50.292 51.943,51.525 51.794,51.674 U19.10 ; v1(49.666,49.14) 49.657,49.149 50.038,49.149 51.435,50.546 51.435,51.181 50.942,51.674 ; v1(54.483,53.467) 54.499,53.451 56.118,53.451 E1.2
  Bottom Layer w0.254: v1(49.666,49.14) 52.95,49.14 54.61,50.8 54.61,53.34 v1(54.483,53.467)
NetJ3_2: J3.2 R37.1 | length 3.4
  Top Layer w0.254: J3.2 12.727,11.938 R37.1
NetJ4_2: J4.2 R38.1 | length 3.2
  Top Layer w0.254: J4.2 20.161,12.079 R38.1
NetJ5_2: J5.2 R39.1 | length 2.7
  Top Layer w0.254: J5.2 R39.1
NetJ9_A5: J9.A5 R46.1 | length 3.5
  Top Layer w0.254: J9.A5 8.08,62.611 9.779,62.611 10.175,63.007 10.175,63.625 10.558,64.008 R46.1
NetJ9_B5: J9.B5 R47.2 | length 3.5
  Top Layer w0.254: J9.B5 9.243,59.591 10.033,58.801 R47.2
NetP1_2: P1.2 R36.2 U12.9 | length 49.5
  Top Layer w0.254: U12.9 14.692,27.218 16.129,25.781 16.129,16.383 17.018,15.494 44.069,15.494 45.974,17.399 R36.2 49.403,18.669 P1.2
NetP1_3: P1.3 R35.2 U12.8 | length 54
  Top Layer w0.254: U12.8 13.842,24.639 v1(14.351,24.13) ; v1@17.272,24.405 v1(17.272,24.13) 17.272,16.637 17.526,16.383 v1(41.041,16.383) ; v1(47.244,19.812) 47.227,19.812 46.084,20.955 R35.2 49.438,20.955 50.113,20.28 P1.3
  Bottom Layer w0.254: v1(14.351,24.13) v1(17.272,24.13) ; v1(41.041,16.383) 45.974,16.383 47.244,17.653 v1(47.244,19.812)
NetP4_1: P4.1 R21.2 U12.4 | length 16.7
  Top Layer w0.254: P4.1 6.35,19.939 7.493,18.796 8.98,18.796 R21.2@9.996,19.812 ; R21.2@10.016,19.812 10.399,20.195 10.399,20.205 10.795,20.601 10.795,26.416 10.442,26.769 U12.4
NetP5_1: P5.1 U12.45 | length 7.8
  Top Layer w0.254: P5.1 5.842,47.244 6.604,46.482 6.604,44.45 7.892,43.162 U12.45
NetQ4_2: Q4.2 R28.1 R29.2 R42.2 | length 7.5
  Top Layer w0.254: Q4.2 49.794,40.782 R29.2 49.788,40.746 R42.2 49.815,37.438 R28.1
NetR3_2: R3.2 U20.5 | length 2.8
  Top Layer w0.254: R3.2@24.076,53.848 U20.5
NetR4_1: R4.1 R43.2 U18.6 | length 5.7
  Top Layer w0.254: U18.6 55.444,32.538 R4.1 55.499,32.431 R43.2
NetR4_2: R4.2 R45.1 | length 11.8
  Top Layer w0.254: R4.2 53.548,30.942 52.705,30.099 52.705,27.432 52.959,27.178 56.752,27.178 58.293,28.719 R45.1
NetR16_1: R16.1 U13.12 U15.8 | length 24.4
  Top Layer w0.254: U13.12 38.835,21.971 R16.1 40.613,22.252 v1(40.767,22.098) ; v1(41.021,36.83) 42.291,35.56 42.799,35.56 43.18,35.179 U15.8
  Bottom Layer w0.254: v1(40.767,22.098) 40.005,22.86 40.005,36.195 40.185,36.375 40.291,36.375 40.746,36.83 v1(41.021,36.83)
NetR17_1: R17.1 U13.11 U15.6 | length 32.4
  Top Layer w0.254: U13.11 36.125,20.637 40.831,20.637 v1(40.894,20.574) ; v1(43.18,38.862) 43.374,38.668 43.374,38.05 45.102,36.322 R17.1 45.112,35.431 44.441,34.76 44.193,34.76 44.18,34.747 U15.6
  Bottom Layer w0.254: v1(40.894,20.574) 41.888,20.574 42.037,20.723 42.037,22.352 40.386,24.003 40.386,34.925 41.275,35.814 41.656,35.814 43.307,37.465 43.307,38.735 v1(43.18,38.862)
NetR19_2: R19.2 U12.36 U20.3 | length 25.9
  Top Layer w0.254: U12.36 15.542,43.355 16.002,43.815 16.991,43.815 17.768,44.592 17.778,44.592 18.161,44.975 R19.2 16.864,44.985 16.256,45.593 16.256,46.228 v1(16.24,46.244) ; v1(19.685,56.388) U20.3
  Bottom Layer w0.254: v1(16.24,46.244) 19.685,49.69 v1(19.685,56.388)
NetR24_1: R24.1 R25.2 U18.3 | length 16.8
  Top Layer w0.254: R25.2 49.711,34.29 v1(52.07,34.29) ; v1(52.07,43.053) 52.351,43.334 R24.1 54.104,42.951 54.104,42.915 55.444,41.575 U18.3
  Bottom Layer w0.254: v1(52.07,34.29) 52.07,34.382 52.832,35.144 52.832,42.291 v1(52.07,43.053)
NetR26_2: R26.2 U15.2 | length 10.7
  Top Layer w0.254: U15.2 42.68,27.572 43.053,27.199 v1(43.053,26.924) ; v1(48.133,26.924) 48.155,26.902 48.365,26.902 48.514,27.051 R26.2
  Bottom Layer w0.254: v1(43.053,26.924) v1(48.133,26.924)
NetR28_2: R28.2 U18.5 | length 2.2
  Top Layer w0.254: R28.2 51.961,35.95 U18.5
NetR30_1: R30.1 R45.2 U14.3 U18.7 | length 46.7
  Top Layer w0.254: U18.7 56.714,35.265 56.541,35.092 56.322,35.092 56.174,34.943 56.174,33.642 56.911,32.905 56.911,32.895 57.287,32.519 R30.1@57.297,32.519 ; U14.3 57.817,57.563 58.674,58.42 v1(58.674,58.674) ; R30.1 57.304,31.198 58.293,30.209 R45.2 59.26,30.199 59.409,30.05 59.409,27.659 v1(58.547,26.797)
  Bottom Layer w0.254: v1(58.547,26.797) 59.436,27.686 59.436,57.912 v1(58.674,58.674)
NetR32_1: R32.1 U21.3 | length 2.6
  Top Layer w0.254: R32.1 36.178,66.04 36.94,65.278 U21.3
NetR33_1: R33.1 R34.1 U21.4 | length 4
  Top Layer w0.254: U21.4 42.826,65.278 R33.1 44.931,65.051 R34.1
NetR40_2: R40.2 U12.38 U20.4 | length 24.7
  Top Layer w0.254: U12.38 13.842,43.308 12.954,44.196 R40.2 14.251,44.985 14.478,45.212 v1(14.478,46.863) ; v1(18.161,54.991) 18.224,55.054 26.792,55.054 U20.4
  Bottom Layer w0.254: v1(14.478,46.863) 18.161,50.546 v1(18.161,54.991)
NetR41_2: R41.2 U12.22 | length 2.8
  Top Layer w0.254: U12.22 23.528,34.457 R41.2
NetR48_2: R48.2 U12.44 | length 2.8
  Top Layer w0.254: U12.44 8.742,45.091 R48.2
NetR49_2: R49.2 U12.30 U20.6 | length 15.7
  Top Layer w0.254: U12.30 22.207,41.257 v1(22.733,41.783) ; v1(24.13,48.768) 24.13,51.706 25.002,52.578 U20.6
  Bottom Layer w0.254: v1(22.733,41.783) 24.13,43.18 v1(24.13,48.768)
NetU16_3: U16.3 U17.1 | length 13.9
  Top Layer w0.254: U17.1 41.402,62.103 45.085,58.42 U16.3
OUT_OPAMP_1: Q4.1 R27.2 | length 10.5
  Top Layer w0.254: Q4.1 45.913,39.431 46.355,38.989 47.498,38.989 v1(47.49,38.981) ; v1(50.292,42.672) 50.292,44.677 R27.2
  Bottom Layer w0.254: v1(47.49,38.981) 49.022,40.513 49.022,42.291 49.403,42.672 v1(50.292,42.672)
OUTA: U16.1 U19.1 U20.14 U22.3 U23.1 | length 53.5
  Top Layer w0.254: U22.3 31.612,37.277 31.463,37.426 31.463,39.591 31.924,40.052 33.702,40.052 34.798,41.148 35.792,41.148 36.427,41.783 36.427,42.798 v1(36.555,42.926) 36.001,43.48 35.768,43.48 35.573,43.675 U23.1 ; U20.14 43.434,56.388 ; v1(41.021,59.309) 43.434,56.896 43.434,56.388 ; U19.1 43.532,55.574 43.434,55.672 43.434,56.388 ; v1(47.371,61.087) 47.371,60.952 48.022,60.301 U16.1
  Bottom Layer w0.254: v1(36.555,42.926) 36.555,43.201 36.83,43.476 36.83,54.864 41.021,59.055 v1(41.021,59.309) 41.021,59.563 42.672,61.214 47.244,61.214 v1(47.371,61.087)
OUTB: U16.2 U19.2 U20.13 U22.1 U23.5 | length 53.4
  Top Layer w0.254: v1(30.734,47.752) 32.614,47.752 32.763,47.603 32.763,46.352 ; U23.5 32.763,46.352 ; U22.1 34.305,40.02 34.925,40.64 v1(36.576,40.64) ; U20.13 37.973,55.118 38.735,55.88 40.767,55.88 41.723,54.924 ; v1(39.624,54.991) 39.691,54.924 41.723,54.924 ; v1(40.005,49.657) 36.957,46.609 33.02,46.609 32.763,46.352 ; U19.2 41.723,54.924 ; v1(46.088,59.677) 46.311,59.677 46.918,59.07 U16.2
  Bottom Layer w0.254: v1(30.734,47.752) 30.734,44.831 32.639,42.926 34.925,42.926 35.844,42.007 35.844,41.372 v1(36.576,40.64) ; v1(40.005,49.657) 40.005,54.335 39.624,54.716 39.624,55.245 42.037,57.658 44.069,57.658 v1(46.088,59.677)
SCL: R1.1 U13.6 | length 6.4
  Top Layer w0.254: R1.1 21.616,21.056 21.971,20.701 U13.6
SDA: R2.1 U13.5 | length 3.3
  Top Layer w0.254: R2.1 23.676,21.971 U13.5
SWITCH_D1,D2: Q4.3 U24.13 U24.16 | length 25.7
  Top Layer w0.254: v1(39.878,48.133) 40.013,47.998 40.013,46.006 40.046,45.973 U24.13 ; U24.16 40.148,40.116 40.386,39.878 43.759,39.878 46.863,42.982 46.863,43.613 47.752,44.502 v1(47.752,44.577)
  Bottom Layer w0.254: v1(39.878,48.133) 44.323,48.133 47.752,44.704 v1(47.752,44.577)
TIMER_IN: U16.7 U21.1 | length 24
  Top Layer w0.254: U21.1 38.481,68.177 38.63,68.326 46.609,68.326 48.768,66.167 v1(48.768,64.77) ; v1(48.768,62.23) 52.429,62.23 52.578,62.081 52.578,59.263 52.429,59.114 51.606,59.114 U16.7
  Bottom Layer w0.254: v1(48.768,62.23) v1(48.768,64.77)
TIMER_OUT: U16.6 U21.6 | length 22.5
  Top Layer w0.254: U21.6 41.294,67.178 42.061,67.945 45.847,67.945 46.482,67.31 46.482,63.776 46.631,63.627 52.81,63.627 52.959,63.478 52.959,58.569 52.81,58.42 U16.6
USB_5v: J9.A4/B9 J9.B4/A9 U25.5 | length 22.4
  Top Layer w0.254: J9.B4/A9 7.226,58.941 6.35,59.817 6.35,62.738 7.366,63.754 J9.A4/B9@8.06,63.754 ; J9.A4/B9 8.877,63.741 9.271,64.135 9.271,65.532 9.525,65.786 15.98,65.786 16.129,65.637 16.129,64.262 15.113,63.246 15.113,61.617 15.262,61.468 U25.5
USB_D+: J9.A6 J9.B6 U25.1 | length 31
  Top Layer w0.254: J9.B6 8.878,60.591 10.795,58.674 13.208,58.674 v1(13.181,58.701) ; J9.A6 9.775,61.591 10.602,62.418 U25.1 13.462,62.56 13.462,63.373 14.986,64.897 v1(15.113,64.897)
  Bottom Layer w0.254: v1(13.181,58.701) 13.254,58.774 18.007,58.774 19.939,60.706 19.939,63.5 18.542,64.897 v1(15.113,64.897)
USB_D-: J9.A7 J9.B7 U25.3 | length 9.1
  Top Layer w0.254: J9.B7 7.134,62.091 6.985,61.942 6.985,61.236 7.134,61.087 9.144,61.087 10.16,60.071 11.938,60.071 12.385,60.518 U25.3
pads on no net: J3.P1 J3.P2 J4.P1 J4.P2 J5.P1 J5.P2 J9. J9.A8 J9.B8 R23.2 U12.10 U12.11 U12.12 U12.13 U12.14 U12.15 U12.16 U12.17 U12.18 U12.19 U12.20 U12.21 U12.25 U12.26 U12.27 U12.28 U12.29 U12.31 U12.32 U12.33 U12.34 U12.35 U12.37 U12.39 U12.40 U12.41 U13.1 U13.2 U13.4 U13.8 U13.9 U13.10 U13.13 U13.15 U15.3 U15.9 U15.10 U17.4 U19.6 U19.17 U19.18 U19.19 U19.20 U19.21 U19.22 U19.23 U19.24 U19.25 U19.26 U19.27 U19.28 U19.29 U20.12 U24.4 U24.5 U24.8 U24.9 U24.10 U24.17

## Polygon pours and split planes (outlines as drawn)
ISO_GND on gnd "ISO_GND_L02_P003" (solid, pour order 3): 31.115,0.508 59.817,0.508 59.817,68.479 31.074,68.479
GND on gnd "GND_L02_P000" (solid, pour order 0): 0.381,68.453 30.48,68.453 30.48,0.381 0.381,0.381
ISO_3.3v on pwr "ISO_3.3V_L03_P002" (solid, pour order 2): 31.074,68.478 59.817,68.478 59.817,0.508 31.115,0.508
3.3v on pwr "3.3V_L03_P001" (solid, pour order 1): 0.381,0.381 0.381,68.453 30.496,68.453 30.496,0.381

## Silkscreen, mask and mechanical layers (free items; w line width, h text height)
Mechanical 1:
  lines w0.254: 30.8,0 30.8,70 ; 0,0 0,70 60,70 60,0 0,0

## Text inside footprints (layer, text, board x,y; h text height)
U14: Top Overlay "*" at 54.61,56.642 h1 r90; Mechanical 13 "*" at 55.768,57.988 h1.27 r90
U15: Top Overlay "*" at 42.028,29.216 h1 r90; Mechanical 13 "*" at 42.977,30.518 h1.27 r90
U21: Top Overlay "*" at 37.91,67.559 h1; Mechanical 13 "*" at 38.983,66.33 h1.27